# EAGLE board Panel1 (EAGLE 6.2), part 1 of 3
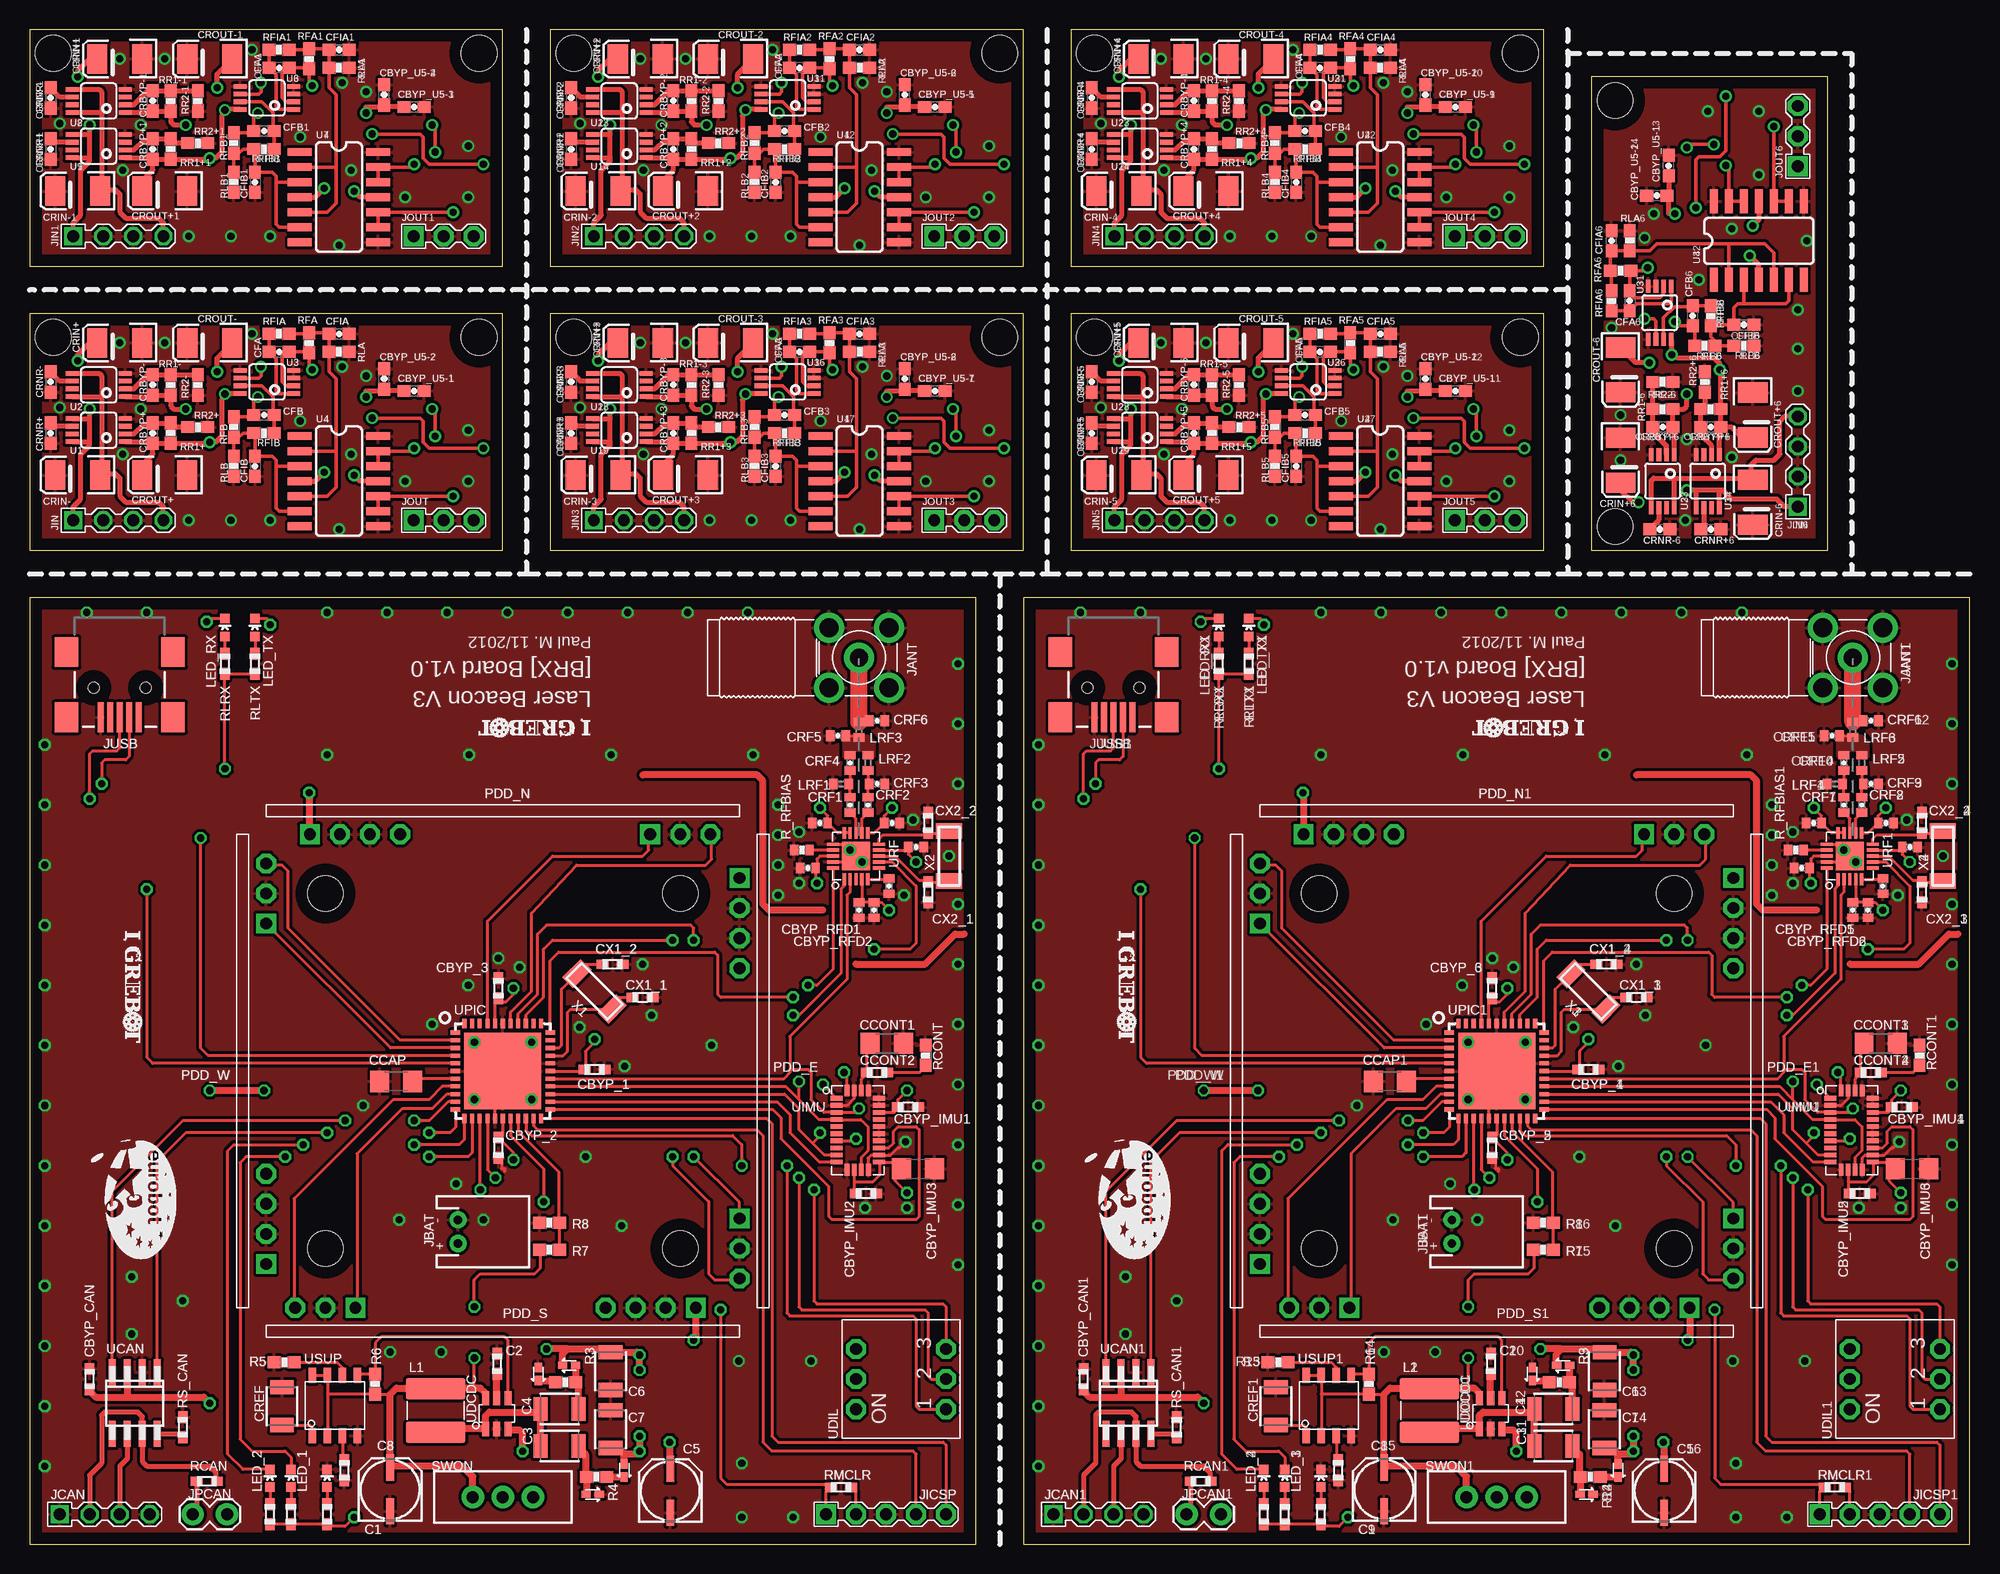
[diagram p0: board, top side]
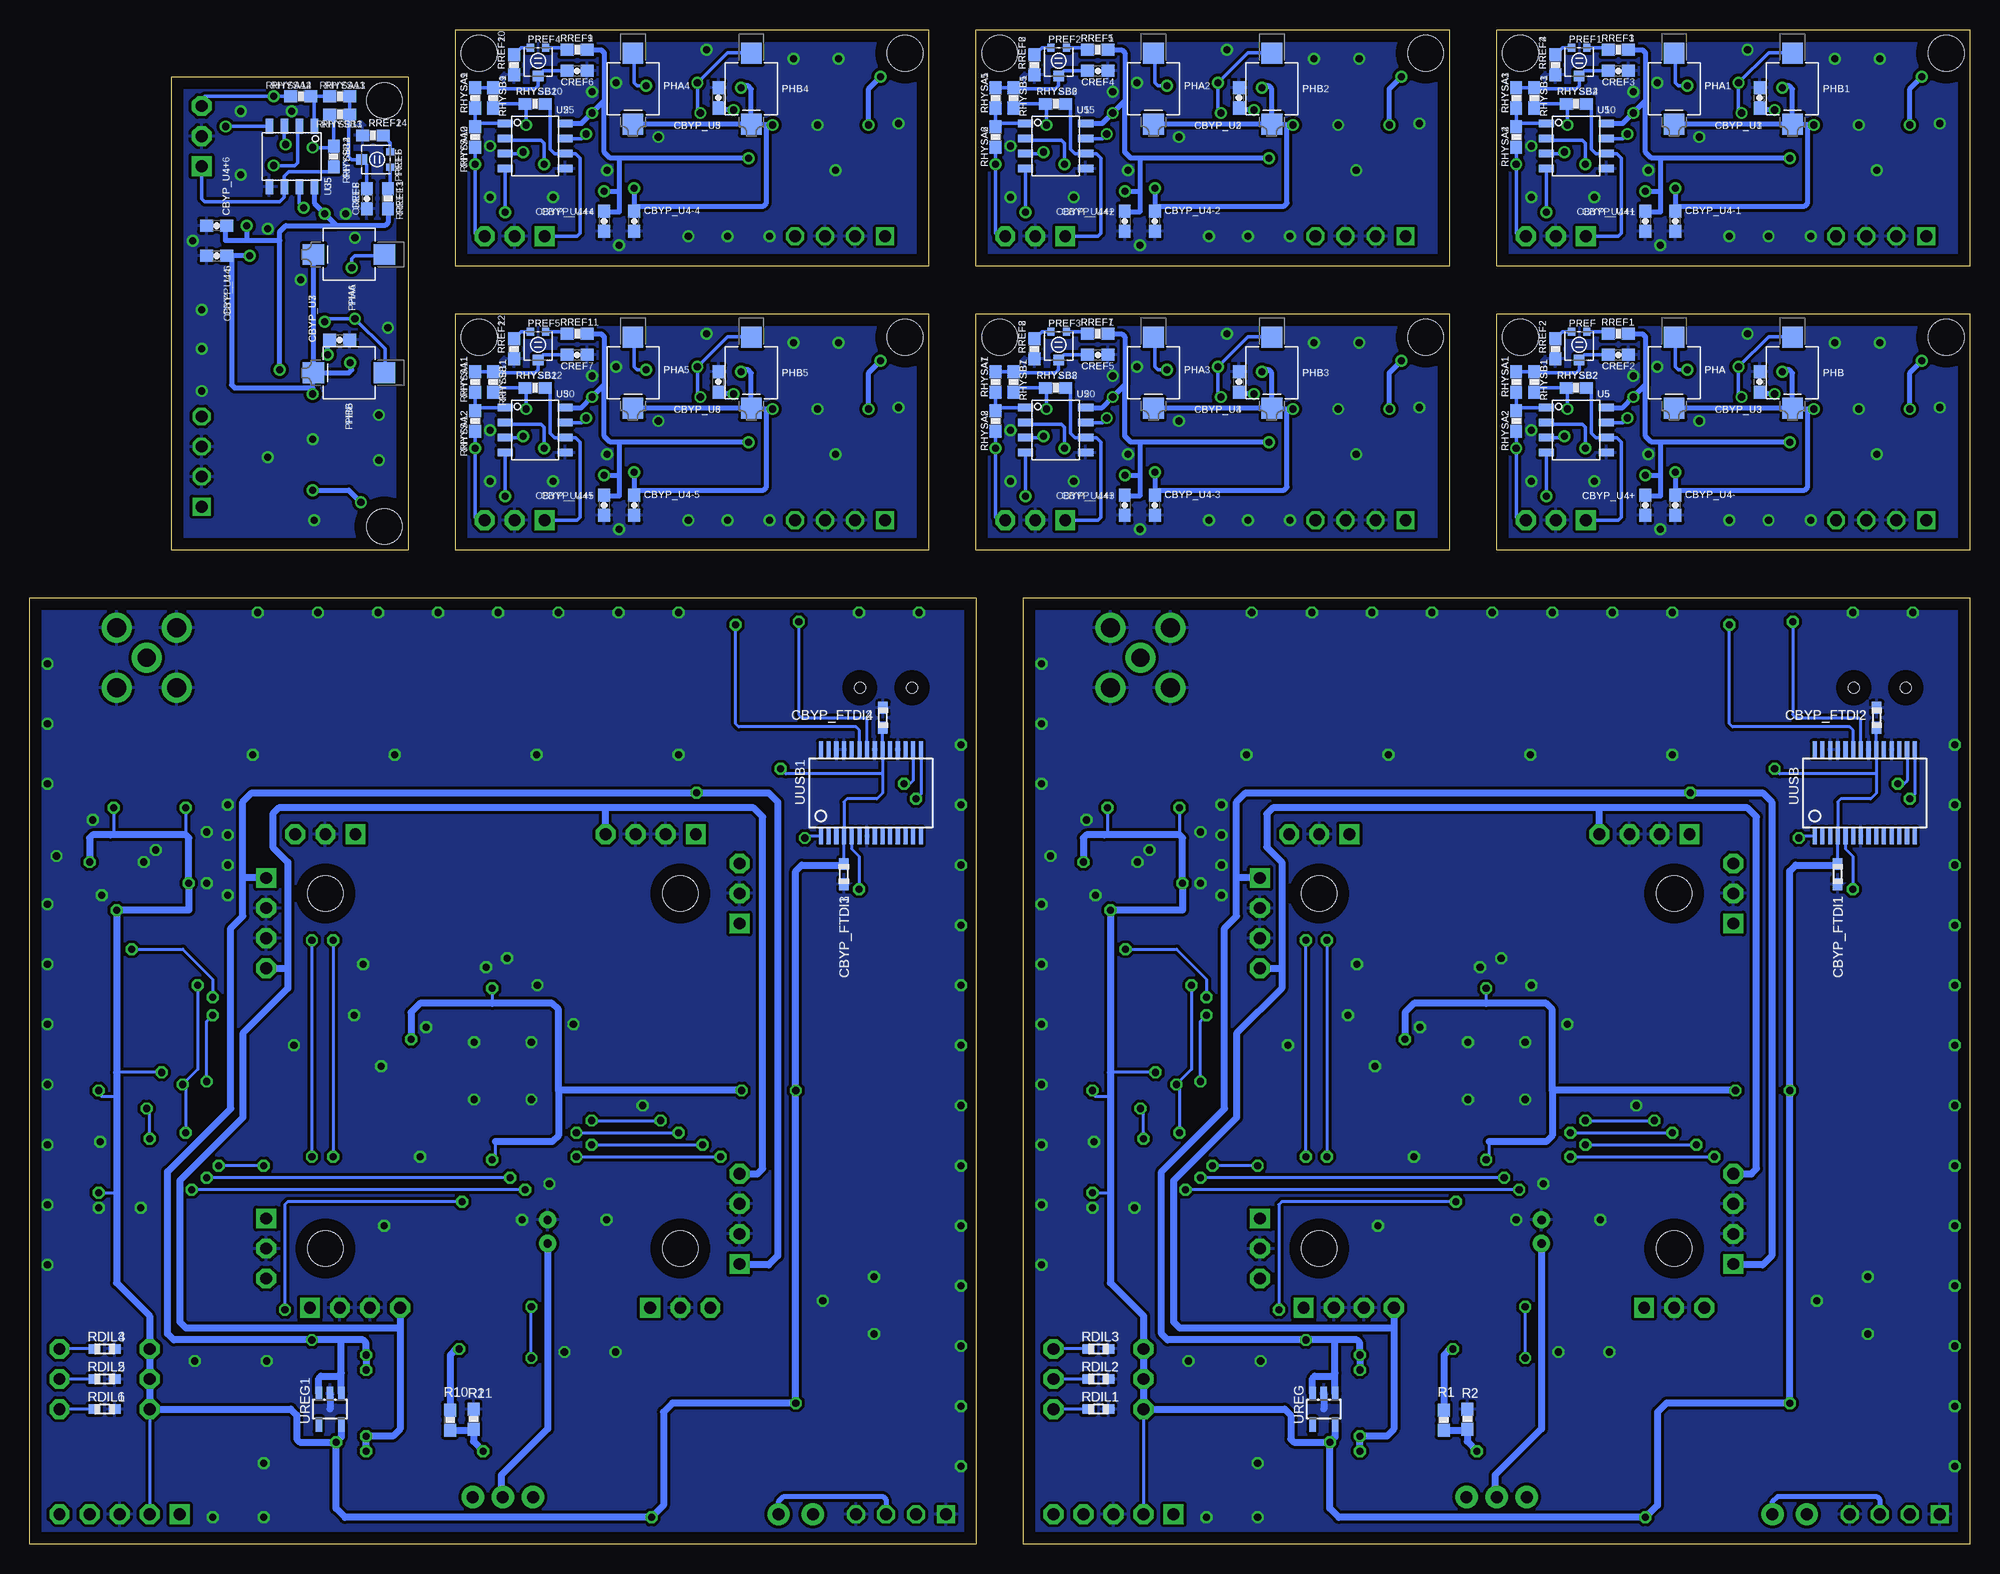
[diagram p1: board, bottom side, seen from below]

Size 164 x 128 mm. Coordinates in mm from the lower left corner, seen from the top.
Outline: 0,0 80,0 80,80 0,80 0,0
Outline: 84,0 164,0 164,80 84,80 84,0
Outline: 0,84 40,84 40,104 0,104 0,84
Outline: 0,108 40,108 40,128 0,128 0,108
Outline: 44,108 84,108 84,128 44,128 44,108
Outline: 44,84 84,84 84,104 44,104 44,84
Outline: 88,108 128,108 128,128 88,128 88,108
Outline: 88,84 128,84 128,104 88,104 88,84
Outline: 152,84 152,124 132,124 132,84 152,84
Copper layers (1*16): Top 0.035mm / dielectric 1.5mm / Bottom 0.035mm
Design rules: minimum track width 10mil, minimum drill 24mil, track to track 8mil, track to pad 8mil, pad to pad 8mil, via to via 8mil, smd to smd 8mil, copper to edge 40mil, drill to drill 8mil, minimum pad ring 10mil, minimum via ring 8mil, stop-mask expansion 4mil, vias tented up to drill 0mil, thermal gap 10mil
Holes 3 mm at 25,55 55,55 55,25 25,25 109,55 139,55 139,25 109,25 38,102 2,102 38,126 2,126 82,126 46,126 82,102 46,102 126,126 90,126 126,102 90,102 134,122 134,86

## Footprints (pad centres in the part's own frame; a part is rotated, then mirrored left to right if it is on the bottom)
PANASONIC_C = smd 2.2 x 0.65: + 1.9,-0.2; - -1.8,-0.2
R0603 = smd 1 x 0.8: 1 -0.85,0; 2 0.85,0
1210 = smd 1.2 x 2: 1 -1.6,0; 2 1.6,0
1206 = smd 1.6 x 1.8: 1 -1.4,0; 2 1.4,0
0402-CAP = smd 0.7 x 0.9: 1 -0.65,0; 2 0.65,0
0603-CAP = smd 1.1 x 1: 1 -0.85,0; 2 0.85,0
EIA3528-KIT = smd 1.7 x 2.5: A 1.9,0; C -1.9,0
SOD-523 = smd 0.8 x 0.6: A -0.55,0; C 0.55,0
SMA-PCB-ANGLE = drill 1.5 pad 2.54: A 0,0 | drill 1.6 pad 2.54: B1 -2.54,2.54; B2 2.54,2.54; B3 2.54,-2.54; B4 -2.54,-2.54
JST-2-PTH = drill 0.7 pad 1.448: 1 -1,0; 2 1,0
CON4-2.54 = drill 1 square: 1 -3.81,0 | drill 1 octagon: 2 -1.27,0; 3 1.27,0; 4 3.81,0
CON5-2.54 = drill 1 pad 1.676 square: 1 -5.08,0 | drill 1 pad 1.676 octagon: 2 -2.54,0; 3 0,0; 4 2.54,0; 5 5.08,0
CON3-2.54 = drill 1 pad 1.676 square: 1 -2.54,0 | drill 1 pad 1.676 octagon: 2 0,0; 3 2.54,0
1X02_LOCK = drill 1.016 pad 1.88: 1 -0.178,0; 2 2.718,0
USB-MINIB = smd 2.5 x 0.5: D+ 2.5,0; D- 2.5,0.8; GND 2.5,-1.6; ID 2.5,-0.8; VBUS 2.5,1.6 | smd 2.5 x 2: MTN1 -3,4.5; MTN2 2.5,4.5; MTN3 -3,-4.5; MTN4 2.5,-4.5 | hole 0.9: 0,2.2; 0,-2.2
L-5X5 = smd 1.8 x 5: 1 -1.85,0; 2 1.85,0
LED-0603 = smd 0.8 x 0.8: A 0,-0.75; C 0,0.75
C0402 = smd 0.7 x 0.9: 1 -0.65,0; 2 0.65,0
PDD_SOCKET = drill 1 pad 1.676 square: 1 -16.31,0; 5 12.46,0 | drill 1 pad 1.676 octagon: 2 -13.77,0; 3 -11.23,0; 4 -8.69,0; 6 15,0; 7 17.54,0
VBPW34SR = smd 1.8 x 1.75: A -3,0; K 3,0
TRIM-PVZ2A = smd 0.6 x 0.7: 1 -0.65,-1.2; 3 0.65,-1.2 | smd 0.9 x 0.9: 2 0,1.2
0603-RES = smd 1.1 x 1: 1 -0.85,0; 2 0.85,0
0402-RES = smd 0.7 x 0.9: 1 -0.65,0; 2 0.65,0
SWITCH-SPDT = drill 1.016 pad 1.88: 1 0,2.54; 2 0,0; 3 0,-2.54
MSOP8 = smd 0.4 x 1.1: 1 -0.975,-2.25; 2 -0.325,-2.25; 3 0.325,-2.25; 4 0.975,-2.25; 5 0.975,2.25; 6 0.325,2.25; 7 -0.325,2.25; 8 -0.975,2.25
SOIC14 = smd 0.66 x 2.032: 1 -3.81,-3.315; 2 -2.54,-3.315; 3 -1.27,-3.315; 4 0,-3.315; 5 1.27,-3.315; 6 2.54,-3.315; 7 3.81,-3.315; 8 3.81,3.315; 9 2.54,3.315; 10 1.27,3.315; 11 0,3.315; 12 -1.27,3.315; 13 -2.54,3.315; 14 -3.81,3.315
SOIC8 = smd 0.635 x 1.27: 1 -1.905,-2.54; 2 -0.635,-2.54; 3 0.635,-2.54; 4 1.905,-2.54; 5 1.905,2.54; 6 0.635,2.54; 7 -0.635,2.54; 8 -1.905,2.54
SO-08 = smd 0.6 x 2.2: 1 -1.905,-2.6; 2 -0.635,-2.6; 3 0.635,-2.6; 4 1.905,-2.6; 5 1.905,2.6; 6 0.635,2.6; 7 -0.635,2.6; 8 -1.905,2.6
TSOT-23 = smd 0.6 x 1.2: 1 -0.95,-1.3; 2 0,-1.3; 3 0.95,-1.3; 4 0.95,1.3; 5 0,1.3; 6 -0.95,1.3
SW_DIP-3 = drill 1 pad 1.676 octagon: 1A -2.54,3.81; 1B -2.54,-3.81; 2A 0,3.81; 2B 0,-3.81; 3A 2.54,3.81; 3B 2.54,-3.81
LLGA-28 = smd 0.4 x 1: 1 2.7,1.8; 2 2.1,1.8; 3 1.5,1.8; 4 0.9,1.8; 5 0.3,1.8; 6 -0.3,1.8; 7 -0.9,1.8; 8 -1.5,1.8; 9 -2.1,1.8; 10 -2.7,1.8; 15 -2.7,-1.8; 16 -2.1,-1.8; 17 -1.5,-1.8; 18 -0.9,-1.8; 19 -0.3,-1.8; 20 0.3,-1.8; 21 0.9,-1.8; 22 1.5,-1.8; 23 2.1,-1.8; 24 2.7,-1.8 | smd 1 x 0.4: 11 -3.35,0.9; 12 -3.35,0.3; 13 -3.35,-0.3; 14 -3.35,-0.9; 25 3.35,-0.9; 26 3.35,-0.3; 27 3.35,0.3; 28 3.35,0.9
QFN44-8X8 = smd 0.8 x 0.35: P$1 -4,3.25; P$2 -4,2.6; P$3 -4,1.95; P$4 -4,1.3; P$5 -4,0.65; P$6 -4,0; P$7 -4,-0.65; P$8 -4,-1.3; P$9 -4,-1.95; P$10 -4,-2.6; P$11 -4,-3.25; P$23 4,-3.25; P$24 4,-2.6; P$25 4,-1.95; P$26 4,-1.3; P$27 4,-0.65; P$28 4,0; P$29 4,0.65; P$30 4,1.3; P$31 4,1.95; P$32 4,2.6; P$33 4,3.25 | smd 0.35 x 0.8: P$12 -3.25,-4; P$13 -2.6,-4; P$14 -1.95,-4; P$15 -1.3,-4; P$16 -0.65,-4; P$17 0,-4; P$18 0.65,-4; P$19 1.3,-4; P$20 1.95,-4; P$21 2.6,-4; P$22 3.25,-4; P$34 3.25,4; P$35 2.6,4; P$36 1.95,4; P$37 1.3,4; P$38 0.65,4; P$39 0,4; P$40 -0.65,4; P$41 -1.3,4; P$42 -1.95,4; P$43 -2.6,4; P$44 -3.25,4 | smd 6.5 x 6.5: PAD 0,0
SOT23-5L = smd 0.55 x 1.2: 1 -0.95,-1.3; 2 0,-1.3; 3 0.95,-1.3; 4 0.95,1.3; 5 -0.95,1.3
QFN20-0.5 = smd 0.28 x 1: 1 -1,-1.95; 2 -0.5,-1.95; 3 0,-1.95; 4 0.5,-1.95; 5 1,-1.95; 11 1,1.95; 12 0.5,1.95; 13 0,1.95; 14 -0.5,1.95; 15 -1,1.95 | smd 1 x 0.28: 6 1.95,-1; 7 1.95,-0.5; 8 1.95,0; 9 1.95,0.5; 10 1.95,1; 16 -1.95,1; 17 -1.95,0.5; 18 -1.95,0; 19 -1.95,-0.5; 20 -1.95,-1 | smd 2.4 x 2.4: PAD 0,0
SSOP28DB = smd 0.348 x 1.397: 1 -4.225,-3.656; 2 -3.575,-3.656; 3 -2.925,-3.656; 4 -2.275,-3.656; 5 -1.625,-3.656; 6 -0.975,-3.656; 7 -0.325,-3.656; 8 0.325,-3.656; 9 0.975,-3.656; 10 1.625,-3.656; 11 2.275,-3.656; 12 2.925,-3.656; 13 3.575,-3.656; 14 4.225,-3.656; 15 4.225,3.656; 16 3.575,3.656; 17 2.925,3.656; 18 2.275,3.656; 19 1.625,3.656; 20 0.975,3.656; 21 0.325,3.656; 22 -0.325,3.656; 23 -0.975,3.656; 24 -1.625,3.656; 25 -2.275,3.656; 26 -2.925,3.656; 27 -3.575,3.656; 28 -4.225,3.656
XTAL_4.9-1.8 = smd 1.3 x 2.2: P$1 -2.1,0; P$2 2.1,0

## Placement (x,y rotation side)
C1  4.7uF  [PANASONIC_C]  30.28,4.6 90 top
C2  47nF_16V  [R0603]  39.52,15.26 90 top
C3  1uF_16V  [1210]  44.79,8.31 0 top
C4  1uF_16V  [1210]  44.79,11.44 0 top
C5  10uF  [PANASONIC_C]  53.95,4.49 90 top
C6  2.2uF_16V  [1210]  49.11,14.64 270 top
C7  2.2uF_16V  [1210]  49.11,9.74 90 top
C8  470nF  [R0603]  26.61,6.27 270 top
C9  4.7uF  [PANASONIC_C]  114.28,4.6 90 top
C10  47nF_16V  [R0603]  123.52,15.26 90 top
C11  1uF_16V  [1210]  128.79,8.31 0 top
C12  1uF_16V  [1210]  128.79,11.44 0 top
C13  2.2uF_16V  [1210]  133.11,14.64 270 top
C14  2.2uF_16V  [1210]  133.11,9.74 90 top
C15  470nF  [R0603]  110.61,6.27 270 top
C16  10uF  [PANASONIC_C]  137.95,4.49 90 top
CBYP_1  100nF_6.3V  [R0603]  47.75,40.13 0 top
CBYP_2  100nF_6.3V  [R0603]  39.62,33.53 270 top
CBYP_3  100nF_6.3V  [R0603]  39.62,46.99 90 top
CBYP_4  100nF_6.3V  [R0603]  131.75,40.13 0 top
CBYP_5  100nF_6.3V  [R0603]  123.62,33.53 270 top
CBYP_6  100nF_6.3V  [R0603]  123.62,46.99 90 top
CBYP_CAN  100nF_6.3V  [R0603]  5.08,13.97 90 top
CBYP_CAN1  100nF_6.3V  [R0603]  89.08,13.97 90 top
CBYP_FTDI1  100nF_6.3V  [R0603]  11.18,56.64 270 bottom
CBYP_FTDI2  100nF_6.3V  [R0603]  7.87,69.85 90 bottom
CBYP_FTDI3  100nF_6.3V  [R0603]  95.18,56.64 270 bottom
CBYP_FTDI4  100nF_6.3V  [R0603]  91.87,69.85 90 bottom
CBYP_IMU1  100nF_6.3V  [R0603]  74.25,36.95 0 top
CBYP_IMU2  100nF_6.3V  [R0603]  70.69,29.64 0 top
CBYP_IMU3  10uF_6.3V  [1206]  75.1,31.74 0 top
CBYP_IMU4  100nF_6.3V  [R0603]  158.25,36.95 0 top
CBYP_IMU5  100nF_6.3V  [R0603]  154.69,29.64 0 top
CBYP_IMU6  10uF_6.3V  [1206]  159.1,31.74 0 top
CBYP_RFA1  100nF_X5R  [0402-CAP]  72.9,60.96 180 top
CBYP_RFA2  100nF_X5R  [0402-CAP]  66.8,60.96 0 top
CBYP_RFA3  220pF_X7R  [0402-CAP]  65.79,57.15 0 top
CBYP_RFA4  220pF_X7R  [0402-CAP]  74.93,58.93 180 top
CBYP_RFA5  100nF_X5R  [0402-CAP]  156.9,60.96 180 top
CBYP_RFA6  100nF_X5R  [0402-CAP]  150.8,60.96 0 top
CBYP_RFA7  220pF_X7R  [0402-CAP]  149.79,57.15 0 top
CBYP_RFA8  220pF_X7R  [0402-CAP]  158.93,58.93 180 top
CBYP_RFD1  100nF_X5R  [0402-CAP]  70.1,53.59 90 top
CBYP_RFD2  220pF_X7R  [0402-CAP]  71.37,53.59 90 top
CBYP_RFD3  100nF_X5R  [0402-CAP]  72.64,55.63 90 top
CBYP_RFD4  100nF_X5R  [0402-CAP]  156.64,55.63 90 top
CBYP_RFD5  100nF_X5R  [0402-CAP]  154.1,53.59 90 top
CBYP_RFD6  220pF_X7R  [0402-CAP]  155.37,53.59 90 top
CBYP_U1  1uF  [0603-CAP]  17.78,122.22 90 bottom
CBYP_U2  1uF  [0603-CAP]  61.78,122.22 90 bottom
CBYP_U3  1uF  [0603-CAP]  17.78,98.22 90 bottom
CBYP_U4  1uF  [0603-CAP]  61.78,98.22 90 bottom
CBYP_U4+  1uF  [0603-CAP]  27.43,87.81 270 bottom
CBYP_U4+1  1uF  [0603-CAP]  27.43,111.81 270 bottom
CBYP_U4+2  1uF  [0603-CAP]  71.43,111.81 270 bottom
CBYP_U4+3  1uF  [0603-CAP]  71.43,87.81 270 bottom
CBYP_U4+4  1uF  [0603-CAP]  115.43,111.81 270 bottom
CBYP_U4+5  1uF  [0603-CAP]  115.43,87.81 270 bottom
CBYP_U4+6  1uF  [0603-CAP]  148.19,111.43 180 bottom
CBYP_U4-  1uF  [0603-CAP]  24.89,87.81 90 bottom
CBYP_U4-1  1uF  [0603-CAP]  24.89,111.81 90 bottom
CBYP_U4-2  1uF  [0603-CAP]  68.89,111.81 90 bottom
CBYP_U4-3  1uF  [0603-CAP]  68.89,87.81 90 bottom
CBYP_U4-4  1uF  [0603-CAP]  112.89,111.81 90 bottom
CBYP_U4-5  1uF  [0603-CAP]  112.89,87.81 90 bottom
CBYP_U4-6  1uF  [0603-CAP]  148.19,108.89 0 bottom
CBYP_U5  1uF  [0603-CAP]  105.78,122.22 90 bottom
CBYP_U5-1  1uF  [0603-CAP]  32.51,97.46 0 top
CBYP_U5-2  100nF  [0603-CAP]  29.97,98.48 90 top
CBYP_U5-3  1uF  [0603-CAP]  32.51,121.46 0 top
CBYP_U5-4  100nF  [0603-CAP]  29.97,122.48 90 top
CBYP_U5-5  1uF  [0603-CAP]  76.51,121.46 0 top
CBYP_U5-6  100nF  [0603-CAP]  73.97,122.48 90 top
CBYP_U5-7  1uF  [0603-CAP]  76.51,97.46 0 top
CBYP_U5-8  100nF  [0603-CAP]  73.97,98.48 90 top
CBYP_U5-9  1uF  [0603-CAP]  120.51,121.46 0 top
CBYP_U5-10  100nF  [0603-CAP]  117.97,122.48 90 top
CBYP_U5-11  1uF  [0603-CAP]  120.51,97.46 0 top
CBYP_U5-12  100nF  [0603-CAP]  117.97,98.48 90 top
CBYP_U5-13  1uF  [0603-CAP]  138.54,116.51 90 top
CBYP_U5-14  100nF  [0603-CAP]  137.52,113.97 180 top
CBYP_U6  1uF  [0603-CAP]  105.78,98.22 90 bottom
CBYP_U7  1uF  [0603-CAP]  137.78,101.78 0 bottom
CCAP  10uF_6.3V  [1206]  30.99,39.12 180 top
CCAP1  10uF_6.3V  [1206]  114.99,39.12 180 top
CCONT1  10nF  [1206]  72.45,42.34 0 top
CCONT2  470nF  [R0603]  71.63,39.88 0 top
CCONT3  10nF  [1206]  156.45,42.34 0 top
CCONT4  470nF  [R0603]  155.63,39.88 0 top
CFA  33pF  [0603-CAP]  21.08,100.76 180 top
CFA1  33pF  [0603-CAP]  21.08,124.76 180 top
CFA2  33pF  [0603-CAP]  65.08,124.76 180 top
CFA3  33pF  [0603-CAP]  65.08,100.76 180 top
CFA4  33pF  [0603-CAP]  109.08,124.76 180 top
CFA5  33pF  [0603-CAP]  109.08,100.76 180 top
CFA6  33pF  [0603-CAP]  135.24,105.08 270 top
CFB  33pF  [0603-CAP]  19.81,95.43 0 top
CFB1  33pF  [0603-CAP]  19.81,119.43 0 top
CFB2  33pF  [0603-CAP]  63.81,119.43 0 top
CFB3  33pF  [0603-CAP]  63.81,95.43 0 top
CFB4  33pF  [0603-CAP]  107.81,119.43 0 top
CFB5  33pF  [0603-CAP]  107.81,95.43 0 top
CFB6  33pF  [0603-CAP]  140.57,103.81 90 top
CFIA  100nF  [0603-CAP]  26.16,102.29 0 top
CFIA1  100nF  [0603-CAP]  26.16,126.29 0 top
CFIA2  100nF  [0603-CAP]  70.16,126.29 0 top
CFIA3  100nF  [0603-CAP]  70.16,102.29 0 top
CFIA4  100nF  [0603-CAP]  114.16,126.29 0 top
CFIA5  100nF  [0603-CAP]  114.16,102.29 0 top
CFIA6  100nF  [0603-CAP]  133.71,110.16 90 top
CFIB  100nF  [0603-CAP]  19.05,91.11 270 top
CFIB1  100nF  [0603-CAP]  19.05,115.11 270 top
CFIB2  100nF  [0603-CAP]  63.05,115.11 270 top
CFIB3  100nF  [0603-CAP]  63.05,91.11 270 top
CFIB4  100nF  [0603-CAP]  107.05,115.11 270 top
CFIB5  100nF  [0603-CAP]  107.05,91.11 270 top
CFIB6  100nF  [0603-CAP]  144.89,103.05 0 top
CRBYP+  10nF  [0603-CAP]  10.41,93.91 90 top
CRBYP+1  10nF  [0603-CAP]  10.41,117.91 90 top
CRBYP+2  10nF  [0603-CAP]  54.41,117.91 90 top
CRBYP+3  10nF  [0603-CAP]  54.41,93.91 90 top
CRBYP+4  10nF  [0603-CAP]  98.41,117.91 90 top
CRBYP+5  10nF  [0603-CAP]  98.41,93.91 90 top
CRBYP+6  10nF  [0603-CAP]  142.09,94.41 180 top
CRBYP-  10nF  [0603-CAP]  10.41,97.97 90 top
CRBYP-1  10nF  [0603-CAP]  10.41,121.97 90 top
CRBYP-2  10nF  [0603-CAP]  54.41,121.97 90 top
CRBYP-3  10nF  [0603-CAP]  54.41,97.97 90 top
CRBYP-4  10nF  [0603-CAP]  98.41,121.97 90 top
CRBYP-5  10nF  [0603-CAP]  98.41,97.97 90 top
CRBYP-6  10nF  [0603-CAP]  138.03,94.41 180 top
CREF  1uF  [1210]  21.34,11.68 270 top
CREF1  1uF  [1210]  105.34,11.68 270 top
CREF2  470nF  [0603-CAP]  29.72,100.51 0 bottom
CREF3  470nF  [0603-CAP]  29.72,124.51 0 bottom
CREF4  470nF  [0603-CAP]  73.72,124.51 0 bottom
CREF5  470nF  [0603-CAP]  73.72,100.51 0 bottom
CREF6  470nF  [0603-CAP]  117.72,124.51 0 bottom
CREF7  470nF  [0603-CAP]  117.72,100.51 0 bottom
CREF8  470nF  [0603-CAP]  135.49,113.72 270 bottom
CRF1  100pF_NP0  [0402-CAP]  69.34,62.48 90 top
CRF2  100pF_NP0  [0402-CAP]  70.87,62.48 90 top
CRF3  1.0pF_NP0  [0402-CAP]  71.63,64.26 180 top
CRF4  1.0pF_NP0  [0402-CAP]  69.34,66.04 270 top
CRF5  1.8pF_NP0  [0402-CAP]  68.33,68.33 0 top
CRF6  1.5pF_NP0  [0402-CAP]  71.63,69.6 180 top
CRF7  100pF_NP0  [0402-CAP]  153.34,62.48 90 top
CRF8  100pF_NP0  [0402-CAP]  154.87,62.48 90 top
CRF9  1.0pF_NP0  [0402-CAP]  155.63,64.26 180 top
CRF10  1.0pF_NP0  [0402-CAP]  153.34,66.04 270 top
CRF11  1.8pF_NP0  [0402-CAP]  152.33,68.33 0 top
CRF12  1.5pF_NP0  [0402-CAP]  155.63,69.6 180 top
CRIN+  10uF  [EIA3528-KIT]  7.62,101.53 180 top
CRIN+1  10uF  [EIA3528-KIT]  7.62,125.53 180 top
CRIN+2  10uF  [EIA3528-KIT]  51.62,125.53 180 top
CRIN+3  10uF  [EIA3528-KIT]  51.62,101.53 180 top
CRIN+4  10uF  [EIA3528-KIT]  95.62,125.53 180 top
CRIN+5  10uF  [EIA3528-KIT]  95.62,101.53 180 top
CRIN+6  10uF  [EIA3528-KIT]  134.47,91.62 270 top
CRIN-  10uF  [EIA3528-KIT]  4.06,90.35 180 top
CRIN-1  10uF  [EIA3528-KIT]  4.06,114.35 180 top
CRIN-2  10uF  [EIA3528-KIT]  48.06,114.35 180 top
CRIN-3  10uF  [EIA3528-KIT]  48.06,90.35 180 top
CRIN-4  10uF  [EIA3528-KIT]  92.06,114.35 180 top
CRIN-5  10uF  [EIA3528-KIT]  92.06,90.35 180 top
CRIN-6  10uF  [EIA3528-KIT]  145.65,88.06 270 top
CRNR+  10nF  [0603-CAP]  1.78,93.91 270 top
CRNR+1  10nF  [0603-CAP]  1.78,117.91 270 top
CRNR+2  10nF  [0603-CAP]  45.78,117.91 270 top
CRNR+3  10nF  [0603-CAP]  45.78,93.91 270 top
CRNR+4  10nF  [0603-CAP]  89.78,117.91 270 top
CRNR+5  10nF  [0603-CAP]  89.78,93.91 270 top
CRNR+6  10nF  [0603-CAP]  142.09,85.78 0 top
CRNR-  10nF  [0603-CAP]  1.78,98.22 270 top
CRNR-1  10nF  [0603-CAP]  1.78,122.22 270 top
CRNR-2  10nF  [0603-CAP]  45.78,122.22 270 top
CRNR-3  10nF  [0603-CAP]  45.78,98.22 270 top
CRNR-4  10nF  [0603-CAP]  89.78,122.22 270 top
CRNR-5  10nF  [0603-CAP]  89.78,98.22 270 top
CRNR-6  10nF  [0603-CAP]  137.78,85.78 0 top
CROUT+  10uF  [EIA3528-KIT]  11.43,90.35 180 top
CROUT+1  10uF  [EIA3528-KIT]  11.43,114.35 180 top
CROUT+2  10uF  [EIA3528-KIT]  55.43,114.35 180 top
CROUT+3  10uF  [EIA3528-KIT]  55.43,90.35 180 top
CROUT+4  10uF  [EIA3528-KIT]  99.43,114.35 180 top
CROUT+5  10uF  [EIA3528-KIT]  99.43,90.35 180 top
CROUT+6  10uF  [EIA3528-KIT]  145.65,95.43 270 top
CROUT-  10uF  [EIA3528-KIT]  15.24,101.53 180 top
CROUT-1  10uF  [EIA3528-KIT]  15.24,125.53 180 top
CROUT-2  10uF  [EIA3528-KIT]  59.24,125.53 180 top
CROUT-3  10uF  [EIA3528-KIT]  59.24,101.53 180 top
CROUT-4  10uF  [EIA3528-KIT]  103.24,125.53 180 top
CROUT-5  10uF  [EIA3528-KIT]  103.24,101.53 180 top
CROUT-6  10uF  [EIA3528-KIT]  134.47,99.24 270 top
CX1_1  22pF_6.3V  [R0603]  51.82,46.23 0 top
CX1_2  22pF_6.3V  [R0603]  49.28,49.02 0 top
CX1_3  22pF_6.3V  [R0603]  135.82,46.23 0 top
CX1_4  22pF_6.3V  [R0603]  133.28,49.02 0 top
CX2_1  22pF_6.3V  [R0603]  75.95,55.12 270 top
CX2_2  22pF_6.3V  [R0603]  75.95,60.96 90 top
CX2_3  22pF_6.3V  [R0603]  159.95,55.12 270 top
CX2_4  22pF_6.3V  [R0603]  159.95,60.96 90 top
D1  PMEG2005  [SOD-523]  45.6,15.12 180 top
D2  PMEG2005  [SOD-523]  43,14.39 270 top
D3  PMEG2005  [SOD-523]  47.59,4.22 0 top
D4  PMEG2005  [SOD-523]  50.26,6.26 270 top
D5  PMEG2005  [SOD-523]  129.6,15.12 180 top
D6  PMEG2005  [SOD-523]  127,14.39 270 top
D7  PMEG2005  [SOD-523]  131.59,4.22 0 top
D8  PMEG2005  [SOD-523]  134.26,6.26 270 top
JANT  ENG_CD_1814400_C1  [SMA-PCB-ANGLE]  70.11,74.93 180 top
JANT1  ENG_CD_1814400_C1  [SMA-PCB-ANGLE]  154.11,74.93 180 top
JBAT  [JST-2-PTH]  36.21,26.42 270 top
JBAT1  [JST-2-PTH]  120.21,26.42 270 top
JCAN  SIL4  [CON4-2.54]  6.35,2.54 0 top
JCAN1  SIL4  [CON4-2.54]  90.35,2.54 0 top
JICSP  SIL5  [CON5-2.54]  72.39,2.54 0 top
JICSP1  SIL5  [CON5-2.54]  156.39,2.54 0 top
JIN  SIL4  [CON4-2.54]  7.5,86.54 0 top
JIN1  SIL4  [CON4-2.54]  7.5,110.54 0 top
JIN2  SIL4  [CON4-2.54]  51.5,110.54 0 top
JIN3  SIL4  [CON4-2.54]  51.5,86.54 0 top
JIN4  SIL4  [CON4-2.54]  95.5,110.54 0 top
JIN5  SIL4  [CON4-2.54]  95.5,86.54 0 top
JIN6  SIL4  [CON4-2.54]  149.46,91.5 90 top
JOUT  SIL3  [CON3-2.54]  35,86.54 0 top
JOUT1  SIL3  [CON3-2.54]  35,110.54 0 top
JOUT2  SIL3  [CON3-2.54]  79,110.54 0 top
JOUT3  SIL3  [CON3-2.54]  79,86.54 0 top
JOUT4  SIL3  [CON3-2.54]  123,110.54 0 top
JOUT5  SIL3  [CON3-2.54]  123,86.54 0 top
JOUT6  SIL3  [CON3-2.54]  149.46,119 90 top
JPCAN  [1X02_LOCK]  13.97,2.54 0 top
JPCAN1  [1X02_LOCK]  97.97,2.54 0 top
JUSB  USBSMD  [USB-MINIB]  7.62,72.39 270 top
JUSB1  USBSMD  [USB-MINIB]  91.62,72.39 270 top
L1  10uH  [L-5X5]  34.31,11.31 270 top
L2  10uH  [L-5X5]  118.31,11.31 270 top
LED_1  [LED-0603]  22.1,5.59 0 top
LED_2  [LED-0603]  20.32,5.59 0 top
LED_3  [LED-0603]  106.1,5.59 0 top
LED_4  [LED-0603]  104.32,5.59 0 top
LED_POW  [LED-0603]  25.15,5.59 0 top
LED_POW1  [LED-0603]  109.15,5.59 0 top
LED_RX  [LED-0603]  16.51,77.47 0 top
LED_RX1  [LED-0603]  100.51,77.47 0 top
LED_TX  [LED-0603]  19.05,77.47 0 top
LED_TX1  [LED-0603]  103.05,77.47 0 top
LRF1  1.2nH  [C0402]  68.58,64.26 0 top
LRF2  1.2nH  [C0402]  70.87,66.04 90 top
LRF3  1.2nH  [C0402]  70.1,68.83 90 top
LRF4  1.2nH  [C0402]  152.58,64.26 0 top
LRF5  1.2nH  [C0402]  154.87,66.04 90 top
LRF6  1.2nH  [C0402]  154.1,68.83 90 top
PDD_E  PDD_BOARD  [PDD_SOCKET]  60,40 270 top
PDD_E1  PDD_BOARD  [PDD_SOCKET]  144,40 270 top
PDD_N  PDD_BOARD  [PDD_SOCKET]  40,60 0 top
PDD_N1  PDD_BOARD  [PDD_SOCKET]  124,60 0 top
PDD_S  PDD_BOARD  [PDD_SOCKET]  40,20 180 top
PDD_S1  PDD_BOARD  [PDD_SOCKET]  124,20 180 top
PDD_W  PDD_BOARD  [PDD_SOCKET]  20,40 90 top
PDD_W1  PDD_BOARD  [PDD_SOCKET]  104,40 90 top
PHA  VBPW34SR  [VBPW34SR]  25,99 90 bottom
PHA1  VBPW34SR  [VBPW34SR]  25,123 90 bottom
PHA2  VBPW34SR  [VBPW34SR]  69,123 90 bottom
PHA3  VBPW34SR  [VBPW34SR]  69,99 90 bottom
PHA4  VBPW34SR  [VBPW34SR]  113,123 90 bottom
PHA5  VBPW34SR  [VBPW34SR]  113,99 90 bottom
PHA6  VBPW34SR  [VBPW34SR]  137,109 0 bottom
PHB  VBPW34SR  [VBPW34SR]  15,99 90 bottom
PHB1  VBPW34SR  [VBPW34SR]  15,123 90 bottom
PHB2  VBPW34SR  [VBPW34SR]  59,123 90 bottom
PHB3  VBPW34SR  [VBPW34SR]  59,99 90 bottom
PHB4  VBPW34SR  [VBPW34SR]  103,123 90 bottom
PHB5  VBPW34SR  [VBPW34SR]  103,99 90 bottom
PHB6  VBPW34SR  [VBPW34SR]  137,99 0 bottom
PREF  100k  [TRIM-PVZ2A]  33.02,101.27 180 bottom
PREF1  100k  [TRIM-PVZ2A]  33.02,125.27 180 bottom
PREF2  100k  [TRIM-PVZ2A]  77.02,125.27 180 bottom
PREF3  100k  [TRIM-PVZ2A]  77.02,101.27 180 bottom
PREF4  100k  [TRIM-PVZ2A]  121.02,125.27 180 bottom
PREF5  100k  [TRIM-PVZ2A]  121.02,101.27 180 bottom
PREF6  100k  [TRIM-PVZ2A]  134.73,117.02 90 bottom
R1  113k  [0603-RES]  44.47,10.5 90 bottom
R2  13.3k  [0603-RES]  42.48,10.58 270 bottom
R3  1  [0603-RES]  45.3,13.71 0 top
R4  1  [0603-RES]  47.92,5.7 180 top
R5  10k  [0603-RES]  21.52,15.38 0 top
R6  10k  [0603-RES]  29.21,13.54 90 top
R7  20k  [0603-RES]  43.94,24.89 0 top
R8  10k  [0603-RES]  43.94,27.18 0 top
R9  1  [0603-RES]  129.3,13.71 0 top
R10  113k  [0603-RES]  128.47,10.5 90 bottom
R11  13.3k  [0603-RES]  126.48,10.58 270 bottom
R12  1  [0603-RES]  131.92,5.7 180 top
R13  10k  [0603-RES]  105.52,15.38 0 top
R14  10k  [0603-RES]  113.21,13.54 90 top
R15  20k  [0603-RES]  127.94,24.89 0 top
R16  10k  [0603-RES]  127.94,27.18 0 top
R_RFBIAS  56k  [0402-RES]  65.28,58.67 180 top
R_RFBIAS1  56k  [0402-RES]  149.28,58.67 180 top
RCAN  100  [R0603]  14.99,5.33 180 top
RCAN1  100  [R0603]  98.99,5.33 180 top
RCONT  10k  [0603-RES]  75.74,41.32 270 top
RCONT1  10k  [0603-RES]  159.74,41.32 270 top
RDIL1  10k  [R0603]  73.66,11.43 0 bottom
RDIL2  10k  [R0603]  73.66,13.97 0 bottom
RDIL3  10k  [R0603]  73.66,16.51 0 bottom
RDIL4  10k  [R0603]  157.66,16.51 0 bottom
RDIL5  10k  [R0603]  157.66,13.97 0 bottom
RDIL6  10k  [R0603]  157.66,11.43 0 bottom
RFA  20k  [0603-RES]  23.62,101.53 90 top
RFA1  20k  [0603-RES]  23.62,125.53 90 top
RFA2  20k  [0603-RES]  67.62,125.53 90 top
RFA3  20k  [0603-RES]  67.62,101.53 90 top
RFA4  20k  [0603-RES]  111.62,125.53 90 top
RFA5  20k  [0603-RES]  111.62,101.53 90 top
RFA6  20k  [0603-RES]  134.47,107.62 180 top
RFB  20k  [0603-RES]  17.27,94.41 270 top
RFB1  20k  [0603-RES]  17.27,118.41 270 top
RFB2  20k  [0603-RES]  61.27,118.41 270 top
RFB3  20k  [0603-RES]  61.27,94.41 270 top
RFB4  20k  [0603-RES]  105.27,118.41 270 top
RFB5  20k  [0603-RES]  105.27,94.41 270 top
RFB6  20k  [0603-RES]  141.59,101.27 0 top
RFIA  100  [0603-RES]  21.08,102.29 0 top
RFIA1  100  [0603-RES]  21.08,126.29 0 top
RFIA2  100  [0603-RES]  65.08,126.29 0 top
RFIA3  100  [0603-RES]  65.08,102.29 0 top
RFIA4  100  [0603-RES]  109.08,126.29 0 top
RFIA5  100  [0603-RES]  109.08,102.29 0 top
RFIA6  100  [0603-RES]  133.71,105.08 90 top
RFIB  100  [0603-RES]  19.81,93.91 180 top
RFIB1  100  [0603-RES]  19.81,117.91 180 top
RFIB2  100  [0603-RES]  63.81,117.91 180 top
RFIB3  100  [0603-RES]  63.81,93.91 180 top
RFIB4  100  [0603-RES]  107.81,117.91 180 top
RFIB5  100  [0603-RES]  107.81,93.91 180 top
RFIB6  100  [0603-RES]  142.09,103.81 270 top
RHYSA1  100  [0603-RES]  38.35,98.22 270 bottom
RHYSA2  10k  [0603-RES]  38.35,94.92 270 bottom
RHYSA3  100  [0603-RES]  38.35,122.22 270 bottom
RHYSA4  10k  [0603-RES]  38.35,118.92 270 bottom
RHYSA5  100  [0603-RES]  82.35,122.22 270 bottom
RHYSA6  10k  [0603-RES]  82.35,118.92 270 bottom
RHYSA7  100  [0603-RES]  82.35,98.22 270 bottom
RHYSA8  10k  [0603-RES]  82.35,94.92 270 bottom
RHYSA9  100  [0603-RES]  126.35,122.22 270 bottom
RHYSA10  10k  [0603-RES]  126.35,118.92 270 bottom
RHYSA11  100  [0603-RES]  126.35,98.22 270 bottom
RHYSA12  10k  [0603-RES]  126.35,94.92 270 bottom
RHYSA13  100  [0603-RES]  137.78,122.35 180 bottom
RHYSA14  10k  [0603-RES]  141.08,122.35 180 bottom
RHYSB1  100  [0603-RES]  36.83,98.22 270 bottom
RHYSB2  10k  [0603-RES]  33.27,97.72 0 bottom
RHYSB3  100  [0603-RES]  36.83,122.22 270 bottom
RHYSB4  10k  [0603-RES]  33.27,121.72 0 bottom
RHYSB5  100  [0603-RES]  80.83,122.22 270 bottom
RHYSB6  10k  [0603-RES]  77.27,121.72 0 bottom
RHYSB7  100  [0603-RES]  80.83,98.22 270 bottom
RHYSB8  10k  [0603-RES]  77.27,97.72 0 bottom
RHYSB9  100  [0603-RES]  124.83,122.22 270 bottom
RHYSB10  10k  [0603-RES]  121.27,121.72 0 bottom
RHYSB11  100  [0603-RES]  124.83,98.22 270 bottom
RHYSB12  10k  [0603-RES]  121.27,97.72 0 bottom
RHYSB13  100  [0603-RES]  137.78,120.83 180 bottom
RHYSB14  10k  [0603-RES]  138.28,117.27 270 bottom
RL1  270  [R0603]  22.1,2.54 90 top
RL2  270  [R0603]  20.32,2.54 90 top
RL3  270  [R0603]  106.1,2.54 90 top
RL4  270  [R0603]  104.32,2.54 90 top
RLA  100k  [0603-RES]  26.16,100.76 180 top
RLA1  100k  [0603-RES]  26.16,124.76 180 top
RLA2  100k  [0603-RES]  70.16,124.76 180 top
RLA3  100k  [0603-RES]  70.16,100.76 180 top
RLA4  100k  [0603-RES]  114.16,124.76 180 top
RLA5  100k  [0603-RES]  114.16,100.76 180 top
RLA6  100k  [0603-RES]  135.24,110.16 270 top
RLB  100k  [0603-RES]  17.27,91.11 90 top
RLB1  100k  [0603-RES]  17.27,115.11 90 top
RLB2  100k  [0603-RES]  61.27,115.11 90 top
RLB3  100k  [0603-RES]  61.27,91.11 90 top
RLB4  100k  [0603-RES]  105.27,115.11 90 top
RLB5  100k  [0603-RES]  105.27,91.11 90 top
RLB6  100k  [0603-RES]  144.89,101.27 180 top
RLPOW  270  [R0603]  25.15,2.54 90 top
RLPOW1  270  [R0603]  109.15,2.54 90 top
RLRX  270  [R0603]  16.51,74.42 90 top
RLRX1  270  [R0603]  100.51,74.42 90 top
RLTX  270  [R0603]  19.05,74.42 90 top
RLTX1  270  [R0603]  103.05,74.42 90 top
RMCLR  4.7k  [R0603]  68.58,4.83 180 top
RMCLR1  4.7k  [R0603]  152.58,4.83 180 top
RR1+  31.6k  [0603-RES]  11.94,93.91 270 top
RR1+1  31.6k  [0603-RES]  11.94,117.91 270 top
RR1+2  31.6k  [0603-RES]  55.94,117.91 270 top
RR1+3  31.6k  [0603-RES]  55.94,93.91 270 top
RR1+4  31.6k  [0603-RES]  99.94,117.91 270 top
RR1+5  31.6k  [0603-RES]  99.94,93.91 270 top
RR1+6  31.6k  [0603-RES]  142.09,95.94 0 top
RR1-  31.6k  [0603-RES]  11.94,97.97 270 top
RR1-1  31.6k  [0603-RES]  11.94,121.97 270 top
RR1-2  31.6k  [0603-RES]  55.94,121.97 270 top
RR1-3  31.6k  [0603-RES]  55.94,97.97 270 top
RR1-4  31.6k  [0603-RES]  99.94,121.97 270 top
RR1-5  31.6k  [0603-RES]  99.94,97.97 270 top
RR1-6  31.6k  [0603-RES]  138.03,95.94 0 top
RR2+  10k  [0603-RES]  14.22,94.41 180 top
RR2+1  10k  [0603-RES]  14.22,118.41 180 top
RR2+2  10k  [0603-RES]  58.22,118.41 180 top
RR2+3  10k  [0603-RES]  58.22,94.41 180 top
RR2+4  10k  [0603-RES]  102.22,118.41 180 top
RR2+5  10k  [0603-RES]  102.22,94.41 180 top
RR2+6  10k  [0603-RES]  141.59,98.22 270 top
RR2-  10k  [0603-RES]  14.22,97.97 90 top
RR2-1  10k  [0603-RES]  14.22,121.97 90 top
RR2-2  10k  [0603-RES]  58.22,121.97 90 top
RR2-3  10k  [0603-RES]  58.22,97.97 90 top
RR2-4  10k  [0603-RES]  102.22,121.97 90 top
RR2-5  10k  [0603-RES]  102.22,97.97 90 top
RR2-6  10k  [0603-RES]  138.03,98.22 180 top
RREF1  100  [0603-RES]  29.72,102.29 180 bottom
RREF2  100  [0603-RES]  35.05,101.02 90 bottom
RREF3  100  [0603-RES]  29.72,126.29 180 bottom
RREF4  100  [0603-RES]  35.05,125.02 90 bottom
RREF5  100  [0603-RES]  73.72,126.29 180 bottom
RREF6  100  [0603-RES]  79.05,125.02 90 bottom
RREF7  100  [0603-RES]  73.72,102.29 180 bottom
RREF8  100  [0603-RES]  79.05,101.02 90 bottom
RREF9  100  [0603-RES]  117.72,126.29 180 bottom
RREF10  100  [0603-RES]  123.05,125.02 90 bottom
RREF11  100  [0603-RES]  117.72,102.29 180 bottom
RREF12  100  [0603-RES]  123.05,101.02 90 bottom
RREF13  100  [0603-RES]  133.71,113.72 90 bottom
RREF14  100  [0603-RES]  134.98,119.05 0 bottom
RS_CAN  10k  [R0603]  12.95,9.91 270 top
RS_CAN1  10k  [R0603]  96.95,9.91 270 top
SWON  [SWITCH-SPDT]  40,4 90 top
SWON1  [SWITCH-SPDT]  124,4 90 top
U1  TPS7A4901NO_PAD  [MSOP8]  5.84,94.16 90 top
U2  TPS7A3001NO_PAD  [MSOP8]  5.84,97.97 90 top
U3  OPA2380  [MSOP8]  20.07,98.22 90 top
U4  INA2143  [SOIC14]  26.16,89.84 270 top
U5  TLV3502  [SOIC8]  33.27,94.16 270 bottom
U6  OPA2380  [MSOP8]  20.07,122.22 90 top
U7  INA2143  [SOIC14]  26.16,113.84 270 top
U8  TPS7A3001NO_PAD  [MSOP8]  5.84,121.97 90 top
U9  TPS7A4901NO_PAD  [MSOP8]  5.84,118.16 90 top
U10  TLV3502  [SOIC8]  33.27,118.16 270 bottom
U11  OPA2380  [MSOP8]  64.07,122.22 90 top
U12  INA2143  [SOIC14]  70.16,113.84 270 top
U13  TPS7A3001NO_PAD  [MSOP8]  49.84,121.97 90 top
U14  TPS7A4901NO_PAD  [MSOP8]  49.84,118.16 90 top
U15  TLV3502  [SOIC8]  77.27,118.16 270 bottom
U16  OPA2380  [MSOP8]  64.07,98.22 90 top
U17  INA2143  [SOIC14]  70.16,89.84 270 top
U18  TPS7A3001NO_PAD  [MSOP8]  49.84,97.97 90 top
U19  TPS7A4901NO_PAD  [MSOP8]  49.84,94.16 90 top
U20  TLV3502  [SOIC8]  77.27,94.16 270 bottom
U21  OPA2380  [MSOP8]  108.07,122.22 90 top
U22  INA2143  [SOIC14]  114.16,113.84 270 top
U23  TPS7A3001NO_PAD  [MSOP8]  93.84,121.97 90 top
U24  TPS7A4901NO_PAD  [MSOP8]  93.84,118.16 90 top
U25  TLV3502  [SOIC8]  121.27,118.16 270 bottom
U26  OPA2380  [MSOP8]  108.07,98.22 90 top
U27  INA2143  [SOIC14]  114.16,89.84 270 top
U28  TPS7A3001NO_PAD  [MSOP8]  93.84,97.97 90 top
U29  TPS7A4901NO_PAD  [MSOP8]  93.84,94.16 90 top
U30  TLV3502  [SOIC8]  121.27,94.16 270 bottom
U31  OPA2380  [MSOP8]  137.78,104.07 180 top
U32  INA2143  [SOIC14]  146.16,110.16 0 top
U33  TPS7A3001NO_PAD  [MSOP8]  138.03,89.84 180 top
U34  TPS7A4901NO_PAD  [MSOP8]  141.84,89.84 180 top
U35  TLV3502  [SOIC8]  141.84,117.27 180 bottom
U$1  LOGOIGREBOT  [LOGO_IGREBOT]  131.5,69.98 180 top
U$2  LOGOEUROBOT  [LOGO_EUROBOT_1]  88.7,34.67 270 top
U$3  LOGOEUROBOT  [LOGO_EUROBOT_1]  4.7,34.67 270 top
U$4  LOGOIGREBOT  [LOGO_IGREBOT]  91.75,51.94 270 top
U$5  LOGOIGREBOT  [LOGO_IGREBOT]  47.5,69.98 180 top
U$9  LOGOIGREBOT  [LOGO_IGREBOT]  7.75,51.94 270 top
UCAN  MCP2551  [SO-08]  8.89,11.94 180 top
UCAN1  MCP2551  [SO-08]  92.89,11.94 180 top
UDCDC  LT3467A  [TSOT-23]  39.49,11.05 0 top
UDCDC1  LT3467A  [TSOT-23]  123.49,11.05 0 top
UDIL  A6E-3104  [SW_DIP-3]  73.66,13.97 90 top
UDIL1  A6E-3104  [SW_DIP-3]  157.66,13.97 90 top
UIMU  LSM330DL  [LLGA-28]  70,35 90 top
UIMU1  LSM330DL  [LLGA-28]  154,35 90 top
UPIC  DSPIC33FJ128MC804_QFN  [QFN44-8X8]  40,40 0 top
UPIC1  DSPIC33FJ128MC804_QFN  [QFN44-8X8]  124,40 0 top
UREG  MCP1801  [SOT23-5L]  54.61,11.43 180 bottom
UREG1  MCP1801  [SOT23-5L]  138.61,11.43 180 bottom
URF  CC2500  [QFN20-0.5]  69.85,58.17 0 top
URF1  CC2500  [QFN20-0.5]  153.85,58.17 0 top
USUP  TL7709AC  [SOIC8]  25.81,11.73 0 top
USUP1  TL7709AC  [SOIC8]  109.81,11.73 0 top
UUSB  FT232RL-BASICSSOP  [SSOP28DB]  8.89,63.5 0 bottom
UUSB1  FT232RL-BASICSSOP  [SSOP28DB]  92.89,63.5 0 bottom
X1  8MHz  [XTAL_4.9-1.8]  47.75,46.74 135 top
X2  26MHz  [XTAL_4.9-1.8]  77.72,58.17 90 top
X3  8MHz  [XTAL_4.9-1.8]  131.75,46.74 135 top
X4  26MHz  [XTAL_4.9-1.8]  161.72,58.17 90 top

## Library data of the parts
C1 C3-C7 C9 C11-C14 C16 CBYP_RFA1-CBYP_RFA8 CBYP_RFD1-CBYP_RFD6 CBYP_U1-CBYP_U4 CBYP_U4+ CBYP_U4+1-CBYP_U4+6 CBYP_U4- CBYP_U4-1-CBYP_U4-6 CBYP_U5 CBYP_U5-1-CBYP_U5-14 CBYP_U6 CBYP_U7 CFA CFA1-CFA6 CFB CFB1-CFB6 CFIA CFIA1-CFIA6 CFIB CFIB1-CFIB6 CRBYP+ CRBYP+1-CRBYP+6 CRBYP- CRBYP-1-CRBYP-6 CREF CREF1-CREF8 CRF1-CRF12 CRIN+ CRIN+1-CRIN+6 CRIN- CRIN-1-CRIN-6 CRNR+ CRNR+1-CRNR+6 CRNR- CRNR-1-CRNR-6 CROUT+ CROUT+1-CROUT+6 CROUT- CROUT-1-CROUT-6 JPCAN JPCAN1 LRF1-LRF6 R1-R16 R_RFBIAS R_RFBIAS1 RCONT RCONT1 RFA RFA1-RFA6 RFB RFB1-RFB6 RFIA RFIA1-RFIA6 RFIB RFIB1-RFIB6 RHYSA1-RHYSA14 RHYSB1-RHYSB14 RLA RLA1-RLA6 RLB RLB1-RLB6 RR1+ RR1+1-RR1+6 RR1- RR1-1-RR1-6 RR2+ RR2+1-RR2+6 RR2- RR2-1-RR2-6 RREF1-RREF14 = SparkFun-Passives
C2 C8 C10 C15 CBYP_1-CBYP_6 CBYP_CAN CBYP_CAN1 CBYP_FTDI1-CBYP_FTDI4 CBYP_IMU1 CBYP_IMU2 CBYP_IMU4 CBYP_IMU5 CCONT2 CCONT4 CX1_1-CX1_4 CX2_1-CX2_4 RCAN RCAN1 RDIL1-RDIL6 RL1-RL4 RLPOW RLPOW1 RLRX RLRX1 RLTX RLTX1 RMCLR RMCLR1 RS_CAN RS_CAN1 U$1-U$5 U$9 UCAN UCAN1 UPIC UPIC1 UREG UREG1 X1-X4 = 0SBLib
CBYP_IMU3 CBYP_IMU6 CCAP CCAP1 CCONT1 CCONT3 JUSB JUSB1 LED_1-LED_4 LED_POW LED_POW1 LED_RX LED_RX1 LED_TX LED_TX1 UUSB UUSB1 = SparkFun
D1-D8 = SparkFun-DiscreteSemi
JANT JANT1 JCAN JCAN1 JICSP JICSP1 JIN JIN1-JIN6 JOUT JOUT1-JOUT6 L1 L2 PDD_E PDD_E1 PDD_N PDD_N1 PDD_S PDD_S1 PDD_W PDD_W1 PHA PHA1-PHA6 PHB PHB1-PHB6 PREF PREF1-PREF6 U1-U35 UDCDC UDCDC1 UDIL UDIL1 UIMU UIMU1 URF URF1 USUP USUP1 = lib_paul_v6
JBAT JBAT1 = SparkFun-Connectors
SWON SWON1 = SparkFun-Electromechanical

## Nets
3.3V: C5.+ CBYP_1.1 CBYP_2.1 CBYP_3.1 CBYP_CAN.1 CBYP_FTDI1.1 CBYP_FTDI2.1 CBYP_IMU1.1 CBYP_IMU2.1 CBYP_IMU3.1 CBYP_RFA1.2 CBYP_RFA2.2 CBYP_RFA3.2 CBYP_RFA4.2 CBYP_RFD1.2 CBYP_RFD2.2 JICSP.2 RL1.1 RL2.1 RLPOW.1 RLRX.1 RLTX.1 RMCLR.1 UCAN.3 UDIL.1A UDIL.2A UDIL.3A UIMU.12 UIMU.15 UIMU.22 UIMU.28 UPIC.P$17 UPIC.P$28 UPIC.P$40 UREG.5 URF.4 URF.9 URF.11 URF.14 URF.15 URF.18 UUSB.4 UUSB.20
3.3V1: C16.+ CBYP_4.1 CBYP_5.1 CBYP_6.1 CBYP_CAN1.1 CBYP_FTDI3.1 CBYP_FTDI4.1 CBYP_IMU4.1 CBYP_IMU5.1 CBYP_IMU6.1 CBYP_RFA5.2 CBYP_RFA6.2 CBYP_RFA7.2 CBYP_RFA8.2 CBYP_RFD5.2 CBYP_RFD6.2 JICSP1.2 RL3.1 RL4.1 RLPOW1.1 RLRX1.1 RLTX1.1 RMCLR1.1 UCAN1.3 UDIL1.1A UDIL1.2A UDIL1.3A UIMU1.12 UIMU1.15 UIMU1.22 UIMU1.28 UPIC1.P$17 UPIC1.P$28 UPIC1.P$40 UREG1.5 URF1.4 URF1.9 URF1.11 URF1.14 URF1.15 URF1.18 UUSB1.4 UUSB1.20
!CMP_A-B!: JOUT.1 RHYSB2.2 U5.6
!CMP_A-B!1: JOUT1.1 RHYSB4.2 U10.6
!CMP_A-B!2: JOUT2.1 RHYSB6.2 U15.6
!CMP_A-B!3: JOUT3.1 RHYSB8.2 U20.6
!CMP_A-B!4: JOUT4.1 RHYSB10.2 U25.6
!CMP_A-B!5: JOUT5.1 RHYSB12.2 U30.6
!CMP_A-B!6: JOUT6.1 RHYSB14.2 U35.6
!CMP_B-A!: JOUT.3 RHYSA2.2 U5.7
!CMP_B-A!1: JOUT1.3 RHYSA4.2 U10.7
!CMP_B-A!2: JOUT2.3 RHYSA6.2 U15.7
!CMP_B-A!3: JOUT3.3 RHYSA8.2 U20.7
!CMP_B-A!4: JOUT4.3 RHYSA10.2 U25.7
!CMP_B-A!5: JOUT5.3 RHYSA12.2 U30.7
!CMP_B-A!6: JOUT6.3 RHYSA14.2 U35.7
!CSN!_A: UIMU.17 UPIC.P$23
!CSN!_A1: UIMU1.17 UPIC1.P$23
!CSN!_G: UIMU.10 UPIC.P$24
!CSN!_G1: UIMU1.10 UPIC1.P$24
!CSN!_RF: UPIC.P$33 URF.7
!CSN!_RF1: UPIC1.P$33 URF1.7
!MCLR!: JICSP.1 RMCLR.2 UPIC.P$18
!MCLR!1: JICSP1.1 RMCLR1.2 UPIC1.P$18
!SHDN!: R6.2 UDCDC.4 USUP.5
!SHDN!1: R14.2 UDCDC1.4 USUP1.5
+5V: CBYP_U3.1 CBYP_U4+.1 CBYP_U5-1.1 CBYP_U5-2.1 CRBYP+.1 CROUT+.A RR1+.2 RREF1.1 U1.1 U3.8 U4.11 U5.8
+5V1: CBYP_U1.1 CBYP_U4+1.1 CBYP_U5-3.1 CBYP_U5-4.1 CRBYP+1.1 CROUT+1.A RR1+1.2 RREF3.1 U6.8 U7.11 U9.1 U10.8
+5V2: CBYP_U2.1 CBYP_U4+2.1 CBYP_U5-5.1 CBYP_U5-6.1 CRBYP+2.1 CROUT+2.A RR1+2.2 RREF5.1 U11.8 U12.11 U14.1 U15.8
+5V3: CBYP_U4+3.1 CBYP_U4.1 CBYP_U5-7.1 CBYP_U5-8.1 CRBYP+3.1 CROUT+3.A RR1+3.2 RREF7.1 U16.8 U17.11 U19.1 U20.8
+5V4: CBYP_U4+4.1 CBYP_U5-9.1 CBYP_U5-10.1 CBYP_U5.1 CRBYP+4.1 CROUT+4.A RR1+4.2 RREF9.1 U21.8 U22.11 U24.1 U25.8
+5V5: CBYP_U4+5.1 CBYP_U5-11.1 CBYP_U5-12.1 CBYP_U6.1 CRBYP+5.1 CROUT+5.A RR1+5.2 RREF11.1 U26.8 U27.11 U29.1 U30.8
+5V6: CBYP_U4+6.1 CBYP_U5-13.1 CBYP_U5-14.1 CBYP_U7.1 CRBYP+6.1 CROUT+6.A RR1+6.2 RREF13.1 U31.8 U32.11 U34.1 U35.8
+12V: C6.1 D1.C PDD_E.1 PDD_N.1 PDD_S.1 PDD_W.1 R1.2 UREG.1 UREG.3
+12V1: C13.1 D5.C PDD_E1.1 PDD_N1.1 PDD_S1.1 PDD_W1.1 R10.2 UREG1.1 UREG1.3
-5V: CBYP_U4-.2 CRBYP-.1 CROUT-.C PHA.A PHB.A RR1-.2 U2.1 U4.4
-5V1: CBYP_U4-1.2 CRBYP-1.1 CROUT-1.C PHA1.A PHB1.A RR1-1.2 U7.4 U8.1
-5V2: CBYP_U4-2.2 CRBYP-2.1 CROUT-2.C PHA2.A PHB2.A RR1-2.2 U12.4 U13.1
-5V3: CBYP_U4-3.2 CRBYP-3.1 CROUT-3.C PHA3.A PHB3.A RR1-3.2 U17.4 U18.1
-5V4: CBYP_U4-4.2 CRBYP-4.1 CROUT-4.C PHA4.A PHB4.A RR1-4.2 U22.4 U23.1
-5V5: CBYP_U4-5.2 CRBYP-5.1 CROUT-5.C PHA5.A PHB5.A RR1-5.2 U27.4 U28.1
-5V6: CBYP_U4-6.2 CRBYP-6.1 CROUT-6.C PHA6.A PHB6.A RR1-6.2 U32.4 U33.1
-12V: C7.1 D4.A PDD_E.4 PDD_N.4 PDD_S.4 PDD_W.4
-12V1: C14.1 D8.A PDD_E1.4 PDD_N1.4 PDD_S1.4 PDD_W1.4
AGND: CBYP_U3.2 CBYP_U4+.2 CBYP_U4-.1 CBYP_U5-1.2 CBYP_U5-2.2 CFIA.2 CFIB.2 CREF2.2 CRIN+.C CRIN-.A CRNR+.2 CRNR-.2 CROUT+.C CROUT-.A JIN.2 JIN.3 JOUT.2 RLA.1 RLB.1 RR2+.1 RR2-.1 RREF2.1 U1.4 U2.4 U3.3 U3.4 U3.5 U4.8 U4.14 U5.5
AGND1: CBYP_U1.2 CBYP_U4+1.2 CBYP_U4-1.1 CBYP_U5-3.2 CBYP_U5-4.2 CFIA1.2 CFIB1.2 CREF3.2 CRIN+1.C CRIN-1.A CRNR+1.2 CRNR-1.2 CROUT+1.C CROUT-1.A JIN1.2 JIN1.3 JOUT1.2 RLA1.1 RLB1.1 RR2+1.1 RR2-1.1 RREF4.1 U6.3 U6.4 U6.5 U7.8 U7.14 U8.4 U9.4 U10.5
AGND2: CBYP_U2.2 CBYP_U4+2.2 CBYP_U4-2.1 CBYP_U5-5.2 CBYP_U5-6.2 CFIA2.2 CFIB2.2 CREF4.2 CRIN+2.C CRIN-2.A CRNR+2.2 CRNR-2.2 CROUT+2.C CROUT-2.A JIN2.2 JIN2.3 JOUT2.2 RLA2.1 RLB2.1 RR2+2.1 RR2-2.1 RREF6.1 U11.3 U11.4 U11.5 U12.8 U12.14 U13.4 U14.4 U15.5
AGND3: CBYP_U4+3.2 CBYP_U4-3.1 CBYP_U4.2 CBYP_U5-7.2 CBYP_U5-8.2 CFIA3.2 CFIB3.2 CREF5.2 CRIN+3.C CRIN-3.A CRNR+3.2 CRNR-3.2 CROUT+3.C CROUT-3.A JIN3.2 JIN3.3 JOUT3.2 RLA3.1 RLB3.1 RR2+3.1 RR2-3.1 RREF8.1 U16.3 U16.4 U16.5 U17.8 U17.14 U18.4 U19.4 U20.5
AGND4: CBYP_U4+4.2 CBYP_U4-4.1 CBYP_U5-9.2 CBYP_U5-10.2 CBYP_U5.2 CFIA4.2 CFIB4.2 CREF6.2 CRIN+4.C CRIN-4.A CRNR+4.2 CRNR-4.2 CROUT+4.C CROUT-4.A JIN4.2 JIN4.3 JOUT4.2 RLA4.1 RLB4.1 RR2+4.1 RR2-4.1 RREF10.1 U21.3 U21.4 U21.5 U22.8 U22.14 U23.4 U24.4 U25.5
AGND5: CBYP_U4+5.2 CBYP_U4-5.1 CBYP_U5-11.2 CBYP_U5-12.2 CBYP_U6.2 CFIA5.2 CFIB5.2 CREF7.2 CRIN+5.C CRIN-5.A CRNR+5.2 CRNR-5.2 CROUT+5.C CROUT-5.A JIN5.2 JIN5.3 JOUT5.2 RLA5.1 RLB5.1 RR2+5.1 RR2-5.1 RREF12.1 U26.3 U26.4 U26.5 U27.8 U27.14 U28.4 U29.4 U30.5
AGND6: CBYP_U4+6.2 CBYP_U4-6.1 CBYP_U5-13.2 CBYP_U5-14.2 CBYP_U7.2 CFIA6.2 CFIB6.2 CREF8.2 CRIN+6.C CRIN-6.A CRNR+6.2 CRNR-6.2 CROUT+6.C CROUT-6.A JIN6.2 JIN6.3 JOUT6.2 RLA6.1 RLB6.1 RR2+6.1 RR2-6.1 RREF14.1 U31.3 U31.4 U31.5 U32.8 U32.14 U33.4 U34.4 U35.5
CAN_RX: UCAN.4 UPIC.P$10
CAN_RX1: UCAN1.4 UPIC1.P$10
CAN_TX: UCAN.1 UPIC.P$11
CAN_TX1: UCAN1.1 UPIC1.P$11
CANH: JCAN.2 RCAN.1 UCAN.7
CANH1: JCAN1.2 RCAN1.1 UCAN1.7
CANL: JCAN.3 JPCAN.2 UCAN.6
CANL1: JCAN1.3 JPCAN1.2 UCAN1.6
DIL1: RDIL1.1 UDIL.1B UPIC.P$20
DIL2: RDIL2.1 UDIL.2B UPIC.P$15
DIL3: RDIL3.1 UDIL.3B UPIC.P$14
DIL4: RDIL4.1 UDIL1.3B UPIC1.P$14
DIL5: RDIL5.1 UDIL1.2B UPIC1.P$15
DIL6: RDIL6.1 UDIL1.1B UPIC1.P$20
E_!A-B!: PDD_E.5 UPIC.P$37
E_!A-B!1: PDD_E1.5 UPIC1.P$37
E_!B-A!: PDD_E.7 UPIC.P$36
E_!B-A!1: PDD_E1.7 UPIC1.P$36
GND: C1.- C2.2 C5.- C6.2 C7.2 C8.2 CBYP_1.2 CBYP_2.2 CBYP_3.2 CBYP_CAN.2 CBYP_FTDI1.2 CBYP_FTDI2.2 CBYP_IMU1.2 CBYP_IMU2.2 CBYP_IMU3.2 CBYP_RFA1.1 CBYP_RFA2.1 CBYP_RFA3.1 CBYP_RFA4.1 CBYP_RFD1.1 CBYP_RFD2.1 CBYP_RFD3.1 CCAP.2 CCONT1.2 CREF.1 CRF3.1 CRF5.1 CRF6.1 CX1_1.2 CX1_2.2 CX2_1.2 CX2_2.2 D2.A D3.C JANT.B1 JANT.B2 JANT.B3 JANT.B4 JBAT.1 JCAN.1 JCAN.4 JICSP.3 JUSB.GND LED_POW.C LRF1.1 PDD_E.2 PDD_E.3 PDD_E.6 PDD_N.2 PDD_N.3 PDD_N.6 PDD_S.2 PDD_S.3 PDD_S.6 PDD_W.2 PDD_W.3 PDD_W.6 R2.1 R5.1 R8.1 R_RFBIAS.2 RCONT.1 RDIL1.2 RDIL2.2 RDIL3.2 RS_CAN.1 UCAN.2 UDCDC.2 UIMU.2 UIMU.11 UIMU.14 UIMU.16 UIMU.18 UIMU.19 UIMU.20 UIMU.23 UIMU.24 UIMU.25 UIMU.27 UPIC.P$6 UPIC.P$16 UPIC.P$29 UPIC.P$39 UPIC.PAD UREG.2 URF.16 URF.19 URF.PAD USUP.4 UUSB.7 UUSB.18 UUSB.21 UUSB.25 UUSB.26
GND1: C9.- C10.2 C13.2 C14.2 C15.2 C16.- CBYP_4.2 CBYP_5.2 CBYP_6.2 CBYP_CAN1.2 CBYP_FTDI3.2 CBYP_FTDI4.2 CBYP_IMU4.2 CBYP_IMU5.2 CBYP_IMU6.2 CBYP_RFA5.1 CBYP_RFA6.1 CBYP_RFA7.1 CBYP_RFA8.1 CBYP_RFD4.1 CBYP_RFD5.1 CBYP_RFD6.1 CCAP1.2 CCONT3.2 CREF1.1 CRF9.1 CRF11.1 CRF12.1 CX1_3.2 CX1_4.2 CX2_3.2 CX2_4.2 D6.A D7.C JANT1.B1 JANT1.B2 JANT1.B3 JANT1.B4 JBAT1.1 JCAN1.1 JCAN1.4 JICSP1.3 JUSB1.GND LED_POW1.C LRF4.1 PDD_E1.2 PDD_E1.3 PDD_E1.6 PDD_N1.2 PDD_N1.3 PDD_N1.6 PDD_S1.2 PDD_S1.3 PDD_S1.6 PDD_W1.2 PDD_W1.3 PDD_W1.6 R11.1 R13.1 R16.1 R_RFBIAS1.2 RCONT1.1 RDIL4.2 RDIL5.2 RDIL6.2 RS_CAN1.1 UCAN1.2 UDCDC1.2 UIMU1.2 UIMU1.11 UIMU1.14 UIMU1.16 UIMU1.18 UIMU1.19 UIMU1.20 UIMU1.23 UIMU1.24 UIMU1.25 UIMU1.27 UPIC1.P$6 UPIC1.P$16 UPIC1.P$29 UPIC1.P$39 UPIC1.PAD UREG1.2 URF1.16 URF1.19 URF1.PAD USUP1.4 UUSB1.7 UUSB1.18 UUSB1.21 UUSB1.25 UUSB1.26
LED_1: LED_1.C UPIC.P$13
LED_2: LED_2.C UPIC.P$12
LED_3: LED_3.C UPIC1.P$13
LED_4: LED_4.C UPIC1.P$12
LED_RX: LED_RX.C UUSB.22
LED_RX1: LED_RX1.C UUSB1.22
LED_TX: LED_TX.C UUSB.23
LED_TX1: LED_TX1.C UUSB1.23
MISO: UIMU.3 UIMU.7 UPIC.P$27 URF.2
MISO1: UIMU1.3 UIMU1.7 UPIC1.P$27 URF1.2
MOSI: UIMU.1 UIMU.9 UPIC.P$25 URF.20
MOSI1: UIMU1.1 UIMU1.9 UPIC1.P$25 URF1.20
N$1: CRF1.2 CRF4.2 LRF1.2
N$2: LED_TX.A RLTX.2
N$3: CRF2.2 CRF3.2 LRF2.1
N$4: CRF4.1 CRF5.2 LRF2.2 LRF3.1
N$5: RS_CAN.2 UCAN.8
N$6: JPCAN.1 RCAN.2
N$7: CRF6.2 JANT.A LRF3.2
N$8: LED_RX.A RLRX.2
N$9: LED_1.A RL1.2
N$10: LED_2.A RL2.2
N$11: C2.1 UDCDC.5
N$12: JBAT.2 SWON.2
N$13: C3.1 C4.1 L1.2 UDCDC.1
N$14: C3.2 D3.A R4.2
N$15: D2.C R3.1
N$16: C4.2 D1.A R3.2
N$17: R5.2 USUP.6
N$18: R1.1 R2.2 UDCDC.3
N$19: D4.C R4.1
N$20: CCONT2.2 RCONT.2
N$22: LED_POW.A RLPOW.2
N$23: RS_CAN1.2 UCAN1.8
N$24: CRF7.2 CRF10.2 LRF4.2
N$25: CRF8.2 CRF9.2 LRF5.1
N$26: CRF10.1 CRF11.2 LRF5.2 LRF6.1
N$27: CRF12.2 JANT1.A LRF6.2
N$28: JPCAN1.1 RCAN1.2
N$29: LED_TX1.A RLTX1.2
N$30: LED_RX1.A RLRX1.2
N$31: LED_3.A RL3.2
N$32: LED_4.A RL4.2
N$33: C11.1 C12.1 L2.2 UDCDC1.1
N$34: C10.1 UDCDC1.5
N$35: D6.C R9.1
N$36: C12.2 D5.A R9.2
N$37: D8.C R12.1
N$38: C11.2 D7.A R12.2
N$39: R10.1 R11.2 UDCDC1.3
N$40: R13.2 USUP1.6
N$41: JBAT1.2 SWON1.2
N$42: CCONT4.2 RCONT1.2
N$43: LED_POW1.A RLPOW1.2
N$45: CRNR+.1 U1.6
N$46: CRNR-.1 U2.6
N$47: CRBYP+.2 RR1+.1 RR2+.2 U1.2
N$48: CRBYP-.2 RR1-.1 RR2-.2 U2.2
N$49: CFA.2 RFIA.1 U3.1
N$50: CFA.1 PHA.K RFA.1 U3.2
N$51: CFB.2 RFIB.1 U3.7
N$52: CFB.1 PHB.K RFB.1 U3.6
N$53: RHYSA1.2 RHYSA2.1 U5.1
N$54: RHYSB1.2 RHYSB2.1 U5.3
N$55: PREF.1 RREF1.2
N$56: PREF.3 RREF2.2
N$57: CRNR+1.1 U9.6
N$58: CRNR-1.1 U8.6
N$59: CRBYP+1.2 RR1+1.1 RR2+1.2 U9.2
N$60: CRBYP-1.2 RR1-1.1 RR2-1.2 U8.2
N$61: CFA1.2 RFIA1.1 U6.1
N$62: CFA1.1 PHA1.K RFA1.1 U6.2
N$63: CFB1.2 RFIB1.1 U6.7
N$64: CFB1.1 PHB1.K RFB1.1 U6.6
N$65: RHYSA3.2 RHYSA4.1 U10.1
N$66: RHYSB3.2 RHYSB4.1 U10.3
N$67: PREF1.1 RREF3.2
N$68: PREF1.3 RREF4.2
N$69: CRNR+2.1 U14.6
N$70: CRNR-2.1 U13.6
N$71: CRBYP+2.2 RR1+2.1 RR2+2.2 U14.2
N$72: CRBYP-2.2 RR1-2.1 RR2-2.2 U13.2
N$73: CFA2.2 RFIA2.1 U11.1
N$74: CFA2.1 PHA2.K RFA2.1 U11.2
N$75: CFB2.2 RFIB2.1 U11.7
N$76: CFB2.1 PHB2.K RFB2.1 U11.6
N$77: RHYSA5.2 RHYSA6.1 U15.1
N$78: RHYSB5.2 RHYSB6.1 U15.3
N$79: PREF2.1 RREF5.2
N$80: PREF2.3 RREF6.2
N$81: CRNR+3.1 U19.6
N$82: CRNR-3.1 U18.6
N$83: CRBYP+3.2 RR1+3.1 RR2+3.2 U19.2
N$84: CRBYP-3.2 RR1-3.1 RR2-3.2 U18.2
N$85: CFA3.2 RFIA3.1 U16.1
N$86: CFA3.1 PHA3.K RFA3.1 U16.2
N$87: CFB3.2 RFIB3.1 U16.7
N$88: CFB3.1 PHB3.K RFB3.1 U16.6
N$89: RHYSA7.2 RHYSA8.1 U20.1
N$90: RHYSB7.2 RHYSB8.1 U20.3
N$91: PREF3.1 RREF7.2
N$92: PREF3.3 RREF8.2
N$93: CRNR+4.1 U24.6
N$94: CRNR-4.1 U23.6
N$95: CRBYP+4.2 RR1+4.1 RR2+4.2 U24.2
N$96: CRBYP-4.2 RR1-4.1 RR2-4.2 U23.2
N$97: CFA4.2 RFIA4.1 U21.1
N$98: CFA4.1 PHA4.K RFA4.1 U21.2
N$99: CFB4.2 RFIB4.1 U21.7
N$100: CFB4.1 PHB4.K RFB4.1 U21.6
N$101: RHYSA9.2 RHYSA10.1 U25.1
N$102: RHYSB9.2 RHYSB10.1 U25.3
N$103: PREF4.1 RREF9.2
N$104: PREF4.3 RREF10.2
N$105: CRNR+5.1 U29.6
N$106: CRNR-5.1 U28.6
N$107: CRBYP+5.2 RR1+5.1 RR2+5.2 U29.2
N$108: CRBYP-5.2 RR1-5.1 RR2-5.2 U28.2
N$109: CFA5.2 RFIA5.1 U26.1
N$110: CFA5.1 PHA5.K RFA5.1 U26.2
N$111: CFB5.2 RFIB5.1 U26.7
N$112: CFB5.1 PHB5.K RFB5.1 U26.6
N$113: RHYSA11.2 RHYSA12.1 U30.1
N$114: RHYSB11.2 RHYSB12.1 U30.3
N$115: PREF5.1 RREF11.2
N$116: PREF5.3 RREF12.2
N$117: CRNR+6.1 U34.6
N$118: CRNR-6.1 U33.6
N$119: CRBYP+6.2 RR1+6.1 RR2+6.2 U34.2
N$120: CRBYP-6.2 RR1-6.1 RR2-6.2 U33.2
N$121: CFA6.2 RFIA6.1 U31.1
N$122: CFA6.1 PHA6.K RFA6.1 U31.2
N$123: CFB6.2 RFIB6.1 U31.7
N$124: CFB6.1 PHB6.K RFB6.1 U31.6
N$125: RHYSA13.2 RHYSA14.1 U35.1
N$126: RHYSB13.2 RHYSB14.1 U35.3
N$127: PREF6.1 RREF13.2
N$128: PREF6.3 RREF14.2
N_!A-B!: PDD_N.5 UPIC.P$41
N_!A-B!1: PDD_N1.5 UPIC1.P$41
N_!B-A!: PDD_N.7 UPIC.P$38
N_!B-A!1: PDD_N1.7 UPIC1.P$38
PGC: JICSP.5 UPIC.P$22
PGC1: JICSP1.5 UPIC1.P$22
PGD: JICSP.4 UPIC.P$21
PGD1: JICSP1.4 UPIC1.P$21
R_RFBIAS: R_RFBIAS.1 URF.17
R_RFBIAS1: R_RFBIAS1.1 URF1.17
RF_N: CRF1.1 URF.13
RF_N1: CRF7.1 URF1.13
RF_P: CRF2.1 URF.12
RF_P1: CRF8.1 URF1.12
S_!A-B!: PDD_S.5 UPIC.P$9
S_!A-B!1: PDD_S1.5 UPIC1.P$9
S_!B-A!: PDD_S.7 UPIC.P$8
S_!B-A!1: PDD_S1.7 UPIC1.P$8
SCLK: UIMU.4 UIMU.13 UPIC.P$26 URF.1
SCLK1: UIMU1.4 UIMU1.13 UPIC1.P$26 URF1.1
SENSE_BAT: R7.2 R8.2 UPIC.P$19
SENSE_BAT1: R15.2 R16.2 UPIC1.P$19
SUB_A-B: U4.9 U4.10 U5.4
SUB_A-B1: U7.9 U7.10 U10.4
SUB_A-B2: U12.9 U12.10 U15.4
SUB_A-B3: U17.9 U17.10 U20.4
SUB_A-B4: U22.9 U22.10 U25.4
SUB_A-B5: U27.9 U27.10 U30.4
SUB_A-B6: U32.9 U32.10 U35.4
SUB_B-A: U4.12 U4.13 U5.2
SUB_B-A1: U7.12 U7.13 U10.2
SUB_B-A2: U12.12 U12.13 U15.2
SUB_B-A3: U17.12 U17.13 U20.2
SUB_B-A4: U22.12 U22.13 U25.2
SUB_B-A5: U27.12 U27.13 U30.2
SUB_B-A6: U32.12 U32.13 U35.2
TI_A: CFIA.1 RFA.2 RFIA.2 RLA.2 U4.2 U4.5
TI_A1: CFIA1.1 RFA1.2 RFIA1.2 RLA1.2 U7.2 U7.5
TI_A2: CFIA2.1 RFA2.2 RFIA2.2 RLA2.2 U12.2 U12.5
TI_A3: CFIA3.1 RFA3.2 RFIA3.2 RLA3.2 U17.2 U17.5
TI_A4: CFIA4.1 RFA4.2 RFIA4.2 RLA4.2 U22.2 U22.5
TI_A5: CFIA5.1 RFA5.2 RFIA5.2 RLA5.2 U27.2 U27.5
TI_A6: CFIA6.1 RFA6.2 RFIA6.2 RLA6.2 U32.2 U32.5
TI_B: CFIB.1 RFB.2 RFIB.2 RLB.2 U4.3 U4.6
TI_B1: CFIB1.1 RFB1.2 RFIB1.2 RLB1.2 U7.3 U7.6
TI_B2: CFIB2.1 RFB2.2 RFIB2.2 RLB2.2 U12.3 U12.6
TI_B3: CFIB3.1 RFB3.2 RFIB3.2 RLB3.2 U17.3 U17.6
TI_B4: CFIB4.1 RFB4.2 RFIB4.2 RLB4.2 U22.3 U22.6
TI_B5: CFIB5.1 RFB5.2 RFIB5.2 RLB5.2 U27.3 U27.6
TI_B6: CFIB6.1 RFB6.2 RFIB6.2 RLB6.2 U32.3 U32.6
USB_RX: UPIC.P$5 UUSB.5
USB_RX1: UPIC1.P$5 UUSB1.5
USB_TX: UPIC.P$4 UUSB.1
USB_TX1: UPIC1.P$4 UUSB1.1
USBDM: JUSB.D- UUSB.16
USBDM1: JUSB1.D- UUSB1.16
USBDP: JUSB.D+ UUSB.15
USBDP1: JUSB1.D+ UUSB1.15
VBAT: C1.+ L1.1 R6.1 R7.1 SWON.1 UDCDC.6 USUP.2 USUP.7 USUP.8
VBAT1: C9.+ L2.1 R14.1 R15.1 SWON1.1 UDCDC1.6 USUP1.2 USUP1.7 USUP1.8
VCAP: CCAP.1 UPIC.P$7
VCAP1: CCAP1.1 UPIC1.P$7
VCONT: CCONT1.1 CCONT2.1 UIMU.26
VCONT1: CCONT3.1 CCONT4.1 UIMU1.26
VCT: C8.1 USUP.3
VCT1: C15.1 USUP1.3
VDCOUPL: CBYP_RFD3.2 URF.5
VDCOUPL1: CBYP_RFD4.2 URF1.5
VIN+: CRIN+.A JIN.1 U1.5 U1.8
VIN+1: CRIN+1.A JIN1.1 U9.5 U9.8
VIN+2: CRIN+2.A JIN2.1 U14.5 U14.8
VIN+3: CRIN+3.A JIN3.1 U19.5 U19.8
VIN+4: CRIN+4.A JIN4.1 U24.5 U24.8
VIN+5: CRIN+5.A JIN5.1 U29.5 U29.8
VIN+6: CRIN+6.A JIN6.1 U34.5 U34.8
VIN-: CRIN-.C JIN.4 U2.5 U2.8
VIN-1: CRIN-1.C JIN1.4 U8.5 U8.8
VIN-2: CRIN-2.C JIN2.4 U13.5 U13.8
VIN-3: CRIN-3.C JIN3.4 U18.5 U18.8
VIN-4: CRIN-4.C JIN4.4 U23.5 U23.8
VIN-5: CRIN-5.C JIN5.4 U28.5 U28.8
VIN-6: CRIN-6.C JIN6.4 U33.5 U33.8
VREF: CREF.2 USUP.1
VREF1: CREF1.2 USUP1.1
VREF2: CREF2.1 PREF.2 RHYSA1.1 RHYSB1.1
VREF3: CREF3.1 PREF1.2 RHYSA3.1 RHYSB3.1
VREF4: CREF4.1 PREF2.2 RHYSA5.1 RHYSB5.1
VREF5: CREF5.1 PREF3.2 RHYSA7.1 RHYSB7.1
VREF6: CREF6.1 PREF4.2 RHYSA9.1 RHYSB9.1
VREF7: CREF7.1 PREF5.2 RHYSA11.1 RHYSB11.1
VREF8: CREF8.1 PREF6.2 RHYSA13.1 RHYSB13.1
W_!A-B!: PDD_W.5 UPIC.P$3
W_!A-B!1: PDD_W1.5 UPIC1.P$3
W_!B-A!: PDD_W.7 UPIC.P$2
W_!B-A!1: PDD_W1.7 UPIC1.P$2
X1_OSC1: CX1_1.1 UPIC.P$30 X1.P$1
X1_OSC2: CX1_2.1 UPIC.P$31 X1.P$2
X1_OSC3: CX1_3.1 UPIC1.P$30 X3.P$1
X1_OSC4: CX1_4.1 UPIC1.P$31 X3.P$2
X2_OSC1: CX2_1.1 URF.8 X2.P$1
X2_OSC2: CX2_2.1 URF.10 X2.P$2
X2_OSC3: CX2_3.1 URF1.8 X4.P$1
X2_OSC4: CX2_4.1 URF1.10 X4.P$2

## Tracks (layer width: path | path; a pad name or v marks a point on that pad's centre or on a via)
3.3V  (via drill 0.6)
  Top 0.254: URF.9 74.02,58.67 CBYP_RFA4.2 74.28,58.31 v74.93,57.66 | URF.4 70.35,54.49 CBYP_RFD1.2 CBYP_RFD2.2 71.99,54.24 v72.64,53.59 | URF.18 66.8,58.17 66.55,57.91 66.55,57.26 CBYP_RFA3.2 66.44,55.99 v66.55,55.88 | URF.14 URF.15 68.3,60.12 CBYP_RFA2.2 67.45,61.58 v66.8,62.23 | URF.11 71.4,60.12 CBYP_RFA1.2 72.25,61.58 v72.9,62.23 | UPIC.P$28 46.77,40 CBYP_1.1 | UPIC.P$40 39.35,45.87 | 39.35,45.87 CBYP_3.1 | JICSP.2 69.85,4.41 RMCLR.1 | 73.14,32.3 UIMU.15 71.88,32.22 71.88,31.24 71.3,30.66 69.7,30.66 | 73.14,32.3 CBYP_IMU3.1 | UIMU.22 73.08,36.5 CBYP_IMU1.1 73.4,37.58 v74.17,38.35 | 73.14,32.3 73.14,30.74 v74.17,29.72 | UIMU.12 69.7,30.66 | 69.7,30.66 69.7,29.78 CBYP_IMU2.1 | UIMU.28 69.1,39.61 v68.83,39.88 | RLTX.1 RLRX.1 v16.51,65.53 | v27.43,2.29 26.67,1.52 25.31,1.52 RLPOW.1 RL1.1 RL2.1 | 39.35,45.87 40.28,45.87 40.89,46.48 v40.89,46.99 | 46.74,40.3 CBYP_1.1 | UPIC.P$17 40,34.51 CBYP_2.1 40.89,33.11 v40.89,32.51 | v47.75,42.67 47.75,42.42 46.99,41.66 46.99,40.22 CBYP_1.1
  Top 0.61: C5.+ 54.15,8.84 v54.1,8.64 | CBYP_CAN.1 5.08,12.95 5.59,12.45 8.38,12.45 | 8.38,12.45 14.73,12.45 v15.24,11.94 | UCAN.3 8.26,12.57 8.38,12.45 | v15.24,38.35 v19.81,38.35
  Bottom 0.254: v66.8,62.23 66.8,59.94 | v72.9,62.23 72.9,60.2 73.15,59.94 | v74.17,38.35 74.17,38.1 73.91,37.85 72.64,37.85 | v74.17,29.72 72.64,29.72 | v68.83,39.88 72.64,39.88 | 7.92,65.11 UUSB.20 7.92,68.96 CBYP_FTDI2.1 | 7.92,65.11 7.92,63.46 8.38,62.99 10.92,62.99 11.18,62.74 11.18,59.85 UUSB.4 CBYP_FTDI1.1 | 7.92,65.11 16.08,65.11 v16.51,65.53 | v40.89,46.99 40.89,45.72 | 40.64,34.04 40.64,32.77 v40.89,32.51 | UDIL.1A JICSP.2
  Bottom 0.61: v74.93,57.66 74.93,59.69 74.68,59.94 73.15,59.94 66.8,59.94 66.55,59.69 v66.55,55.88 66.55,53.59 v72.64,53.59 72.64,39.88 72.64,37.85 72.64,29.72 72.64,22.1 69.85,19.3 UDIL.3A UDIL.2A UDIL.1A 57.91,11.43 57.4,10.92 57.4,8.89 57.15,8.64 v54.1,8.64 | v54.1,8.64 53.66,9.08 UREG.5 | v54.1,8.64 54.1,3.05 53.34,2.29 v27.43,2.29 26.42,3.3 26.42,11.18 25.65,11.94 v15.24,11.94 v15.24,38.35 15.24,56.9 14.73,57.4 11.26,57.4 CBYP_FTDI1.1 | v19.81,38.35 35.31,38.35 | 35.31,38.35 35.31,34.54 35.81,34.04 40.64,34.04 | 35.31,38.35 35.31,45.21 35.81,45.72 40.89,45.72 46.99,45.72 47.75,44.96 v47.75,42.67
3.3V1  (via drill 0.6)
  Top 0.254: URF1.9 158.02,58.67 CBYP_RFA8.2 158.28,58.31 v158.93,57.66 | URF1.4 154.35,54.49 CBYP_RFD5.2 CBYP_RFD6.2 155.99,54.24 v156.64,53.59 | URF1.18 150.8,58.17 150.55,57.91 150.55,57.26 CBYP_RFA7.2 150.44,55.99 v150.55,55.88 | URF1.14 URF1.15 152.3,60.12 CBYP_RFA6.2 151.45,61.58 v150.8,62.23 | URF1.11 155.4,60.12 CBYP_RFA5.2 156.25,61.58 v156.9,62.23 | UPIC1.P$28 130.77,40 CBYP_4.1 | UPIC1.P$40 123.35,45.87 | 123.35,45.87 CBYP_6.1 | JICSP1.2 153.85,4.41 RMCLR1.1 | 157.14,32.3 UIMU1.15 155.88,32.22 155.88,31.24 155.3,30.66 153.7,30.66 | 157.14,32.3 CBYP_IMU6.1 | UIMU1.22 157.08,36.5 CBYP_IMU4.1 157.4,37.58 v158.17,38.35 | 157.14,32.3 157.14,30.74 v158.17,29.72 | UIMU1.12 153.7,30.66 | 153.7,30.66 153.7,29.78 CBYP_IMU5.1 | UIMU1.28 153.1,39.61 v152.83,39.88 | RLTX1.1 RLRX1.1 v100.51,65.53 | v111.43,2.29 110.67,1.52 109.31,1.52 RLPOW1.1 RL3.1 RL4.1 | 123.35,45.87 124.28,45.87 124.89,46.48 v124.89,46.99 | 130.74,40.3 CBYP_4.1 | UPIC1.P$17 124,34.51 CBYP_5.1 124.89,33.11 v124.89,32.51 | v131.75,42.67 131.75,42.42 130.99,41.66 130.99,40.22 CBYP_4.1
  Top 0.61: C16.+ 138.15,8.84 v138.1,8.64 | CBYP_CAN1.1 89.08,12.95 89.59,12.45 92.38,12.45 | 92.38,12.45 98.73,12.45 v99.24,11.94 | UCAN1.3 92.25,12.57 92.38,12.45 | v99.24,38.35 v103.81,38.35
  Bottom 0.254: v150.8,62.23 150.8,59.94 | v156.9,62.23 156.9,60.2 157.15,59.94 | v158.17,38.35 158.17,38.1 157.91,37.85 156.64,37.85 | v158.17,29.72 156.64,29.72 | v152.83,39.88 156.64,39.88 | 91.92,65.11 UUSB1.20 91.92,68.96 CBYP_FTDI4.1 | 91.92,65.11 91.92,63.46 92.38,62.99 94.92,62.99 95.18,62.74 95.18,59.85 UUSB1.4 CBYP_FTDI3.1 | 91.92,65.11 100.08,65.11 v100.51,65.53 | v124.89,46.99 124.89,45.72 | 124.64,34.04 124.64,32.77 v124.89,32.51 | UDIL1.1A JICSP1.2
  Bottom 0.61: v158.93,57.66 158.93,59.69 158.68,59.94 157.15,59.94 150.8,59.94 150.55,59.69 v150.55,55.88 150.55,53.59 v156.64,53.59 156.64,39.88 156.64,37.85 156.64,29.72 156.64,22.1 153.85,19.3 UDIL1.3A UDIL1.2A UDIL1.1A 141.91,11.43 141.4,10.92 141.4,8.89 141.15,8.64 v138.1,8.64 | v138.1,8.64 137.66,9.08 UREG1.5 | v138.1,8.64 138.1,3.05 137.34,2.29 v111.43,2.29 110.42,3.3 110.42,11.18 109.65,11.94 v99.24,11.94 v99.24,38.35 99.24,56.9 98.73,57.4 95.26,57.4 CBYP_FTDI3.1 | v103.81,38.35 119.31,38.35 | 119.31,38.35 119.31,34.54 119.81,34.04 124.64,34.04 | 119.31,38.35 119.31,45.21 119.81,45.72 124.89,45.72 130.99,45.72 131.75,44.96 v131.75,42.67
!CMP_A-B!
  Bottom 0.305: RHYSB2.2 32,97.55 32,93.91 31.62,93.53 U5.6 29.84,93.53 29.46,93.14 29.46,86.79 29.72,86.54 JOUT.1
!CMP_A-B!1
  Bottom 0.305: RHYSB4.2 32,121.55 32,117.91 31.62,117.53 U10.6 29.84,117.53 29.46,117.14 29.46,110.79 29.72,110.54 JOUT1.1
!CMP_A-B!2